# Altium PCB SGK_DVR_01.PcbDoc (part 1 of 7)
Units mil, origin at the board's own origin, x right, y up, seen from the top; angles counter-clockwise.
Board outline 3070.87 x 2598.47 mil, 6 copper layers (Top, L2 GND, l3 POWER, L4 SIG, L5 GND, Bottom), stack 58.1 mil thick; 475 components, 339 nets, 1964 pads, 1036 vias.
Unrouted connection lines stored in the file: 522.
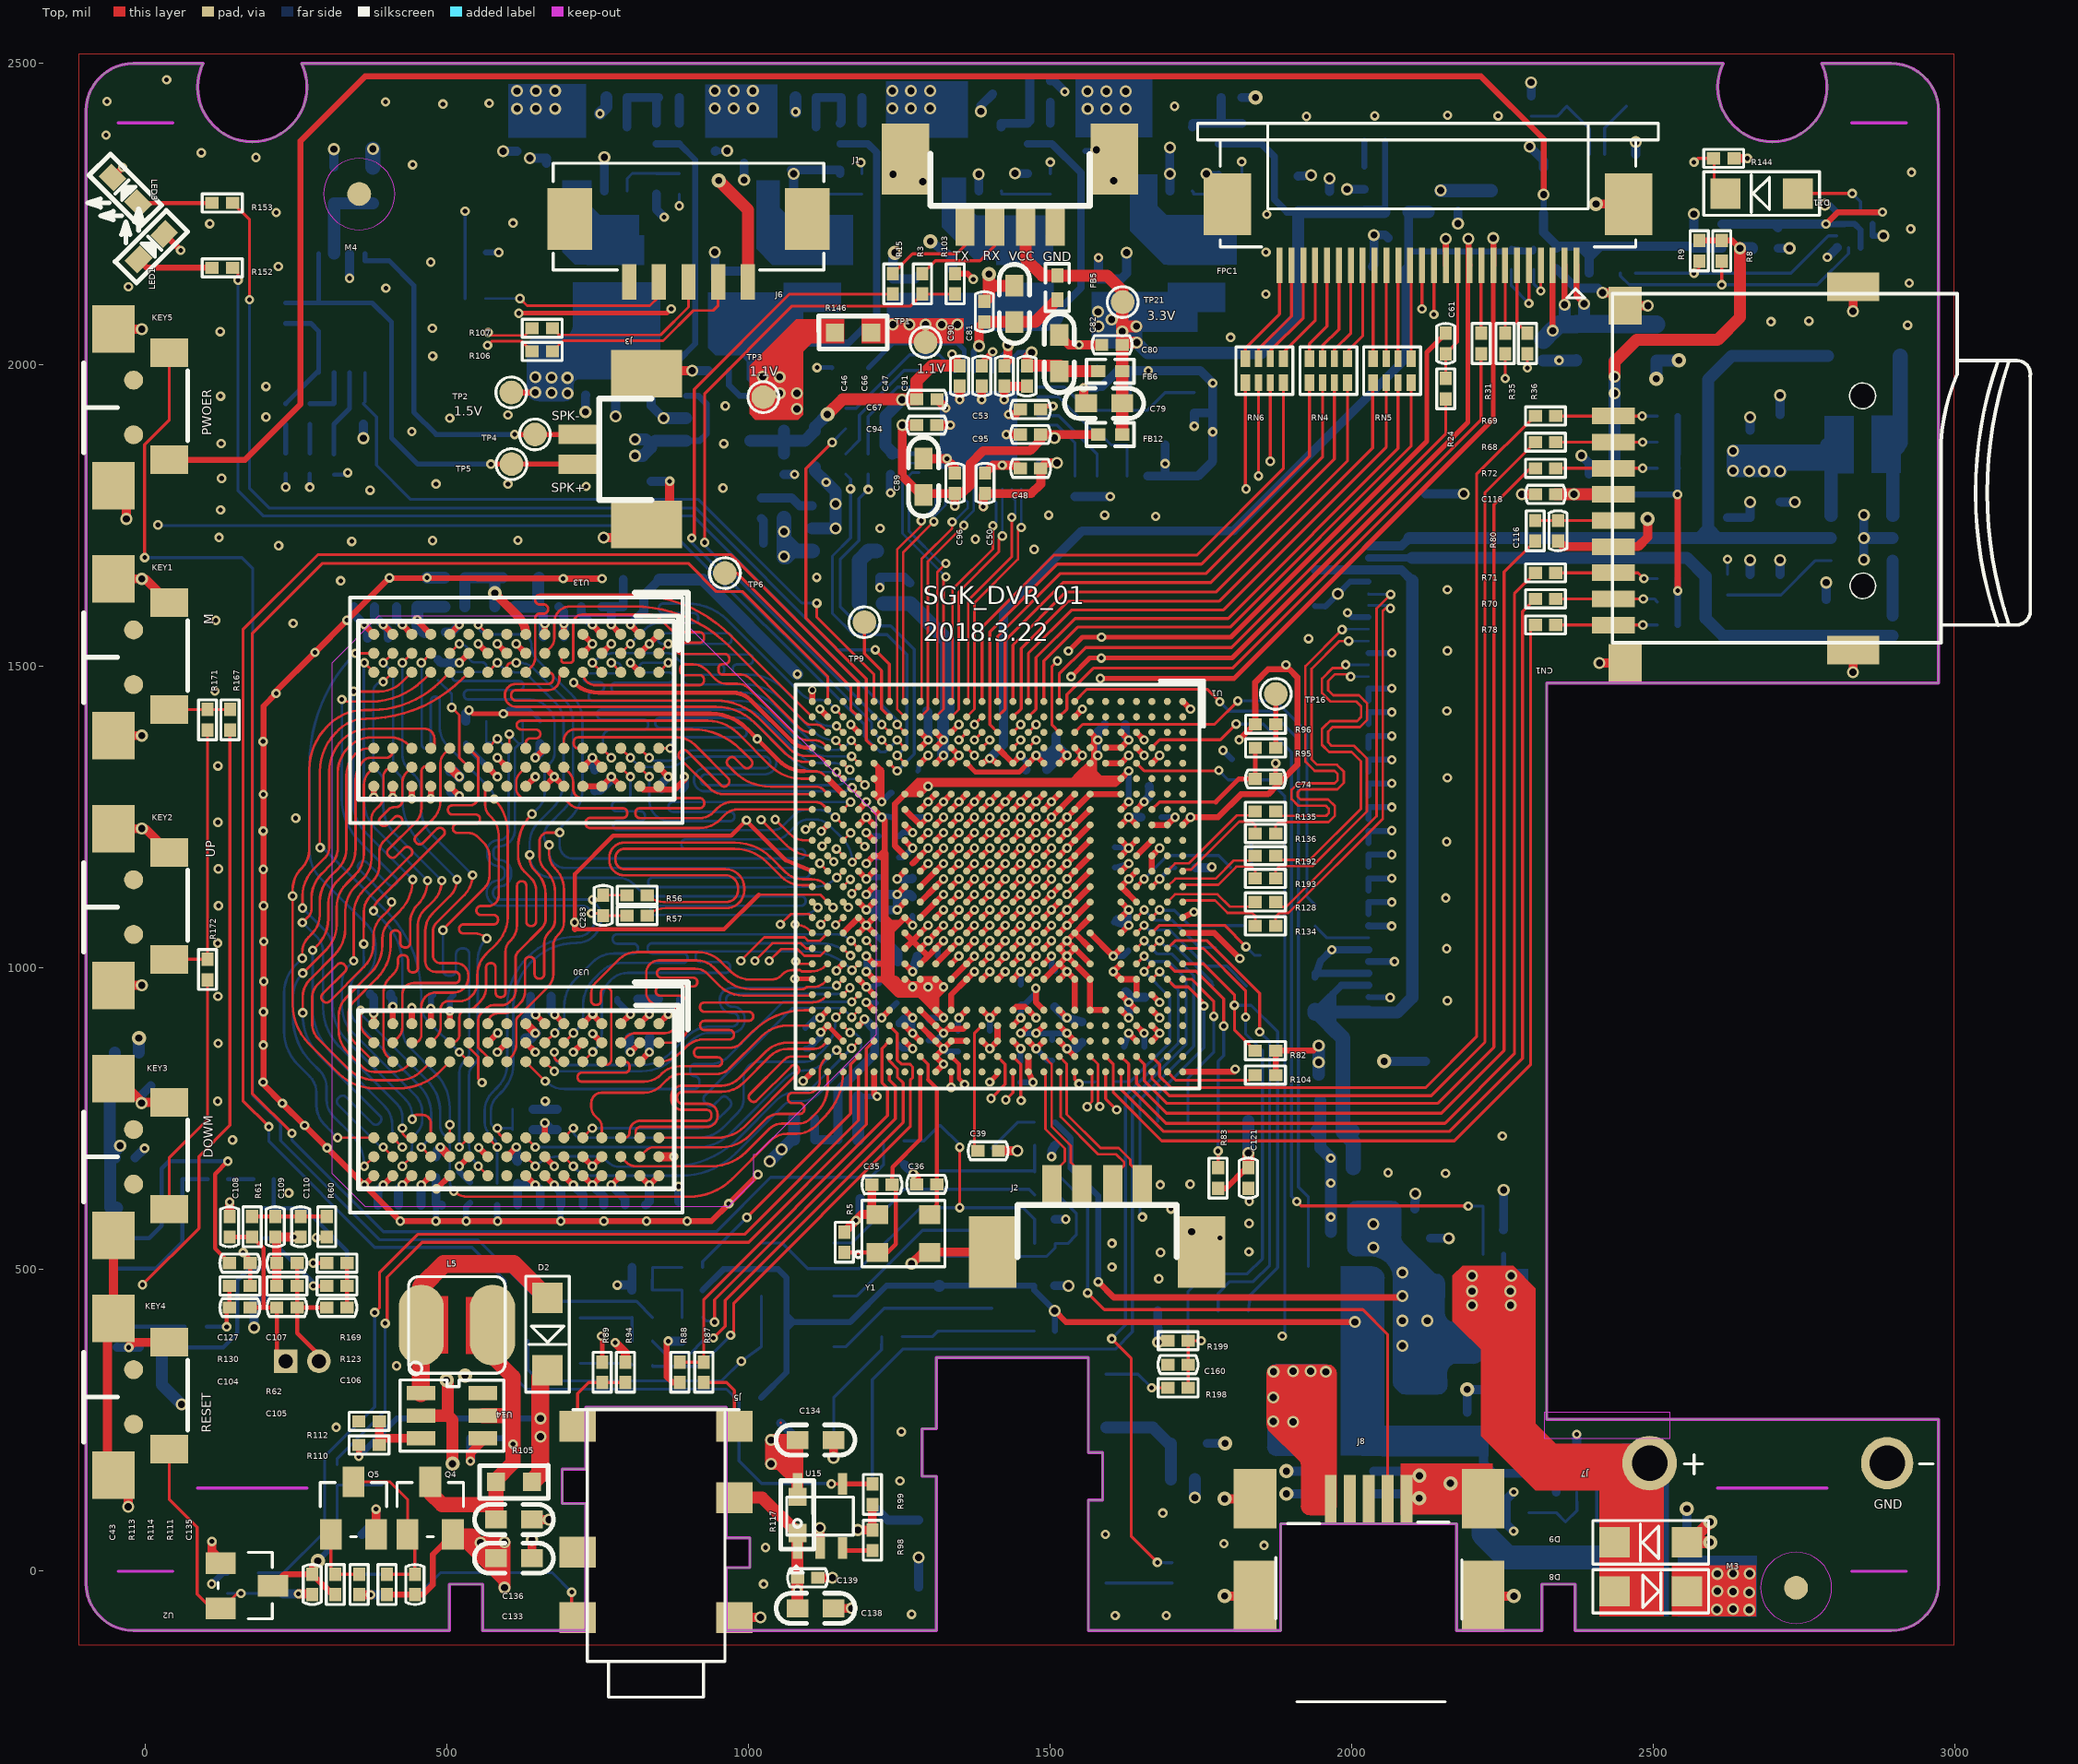
[diagram p0: Top view]
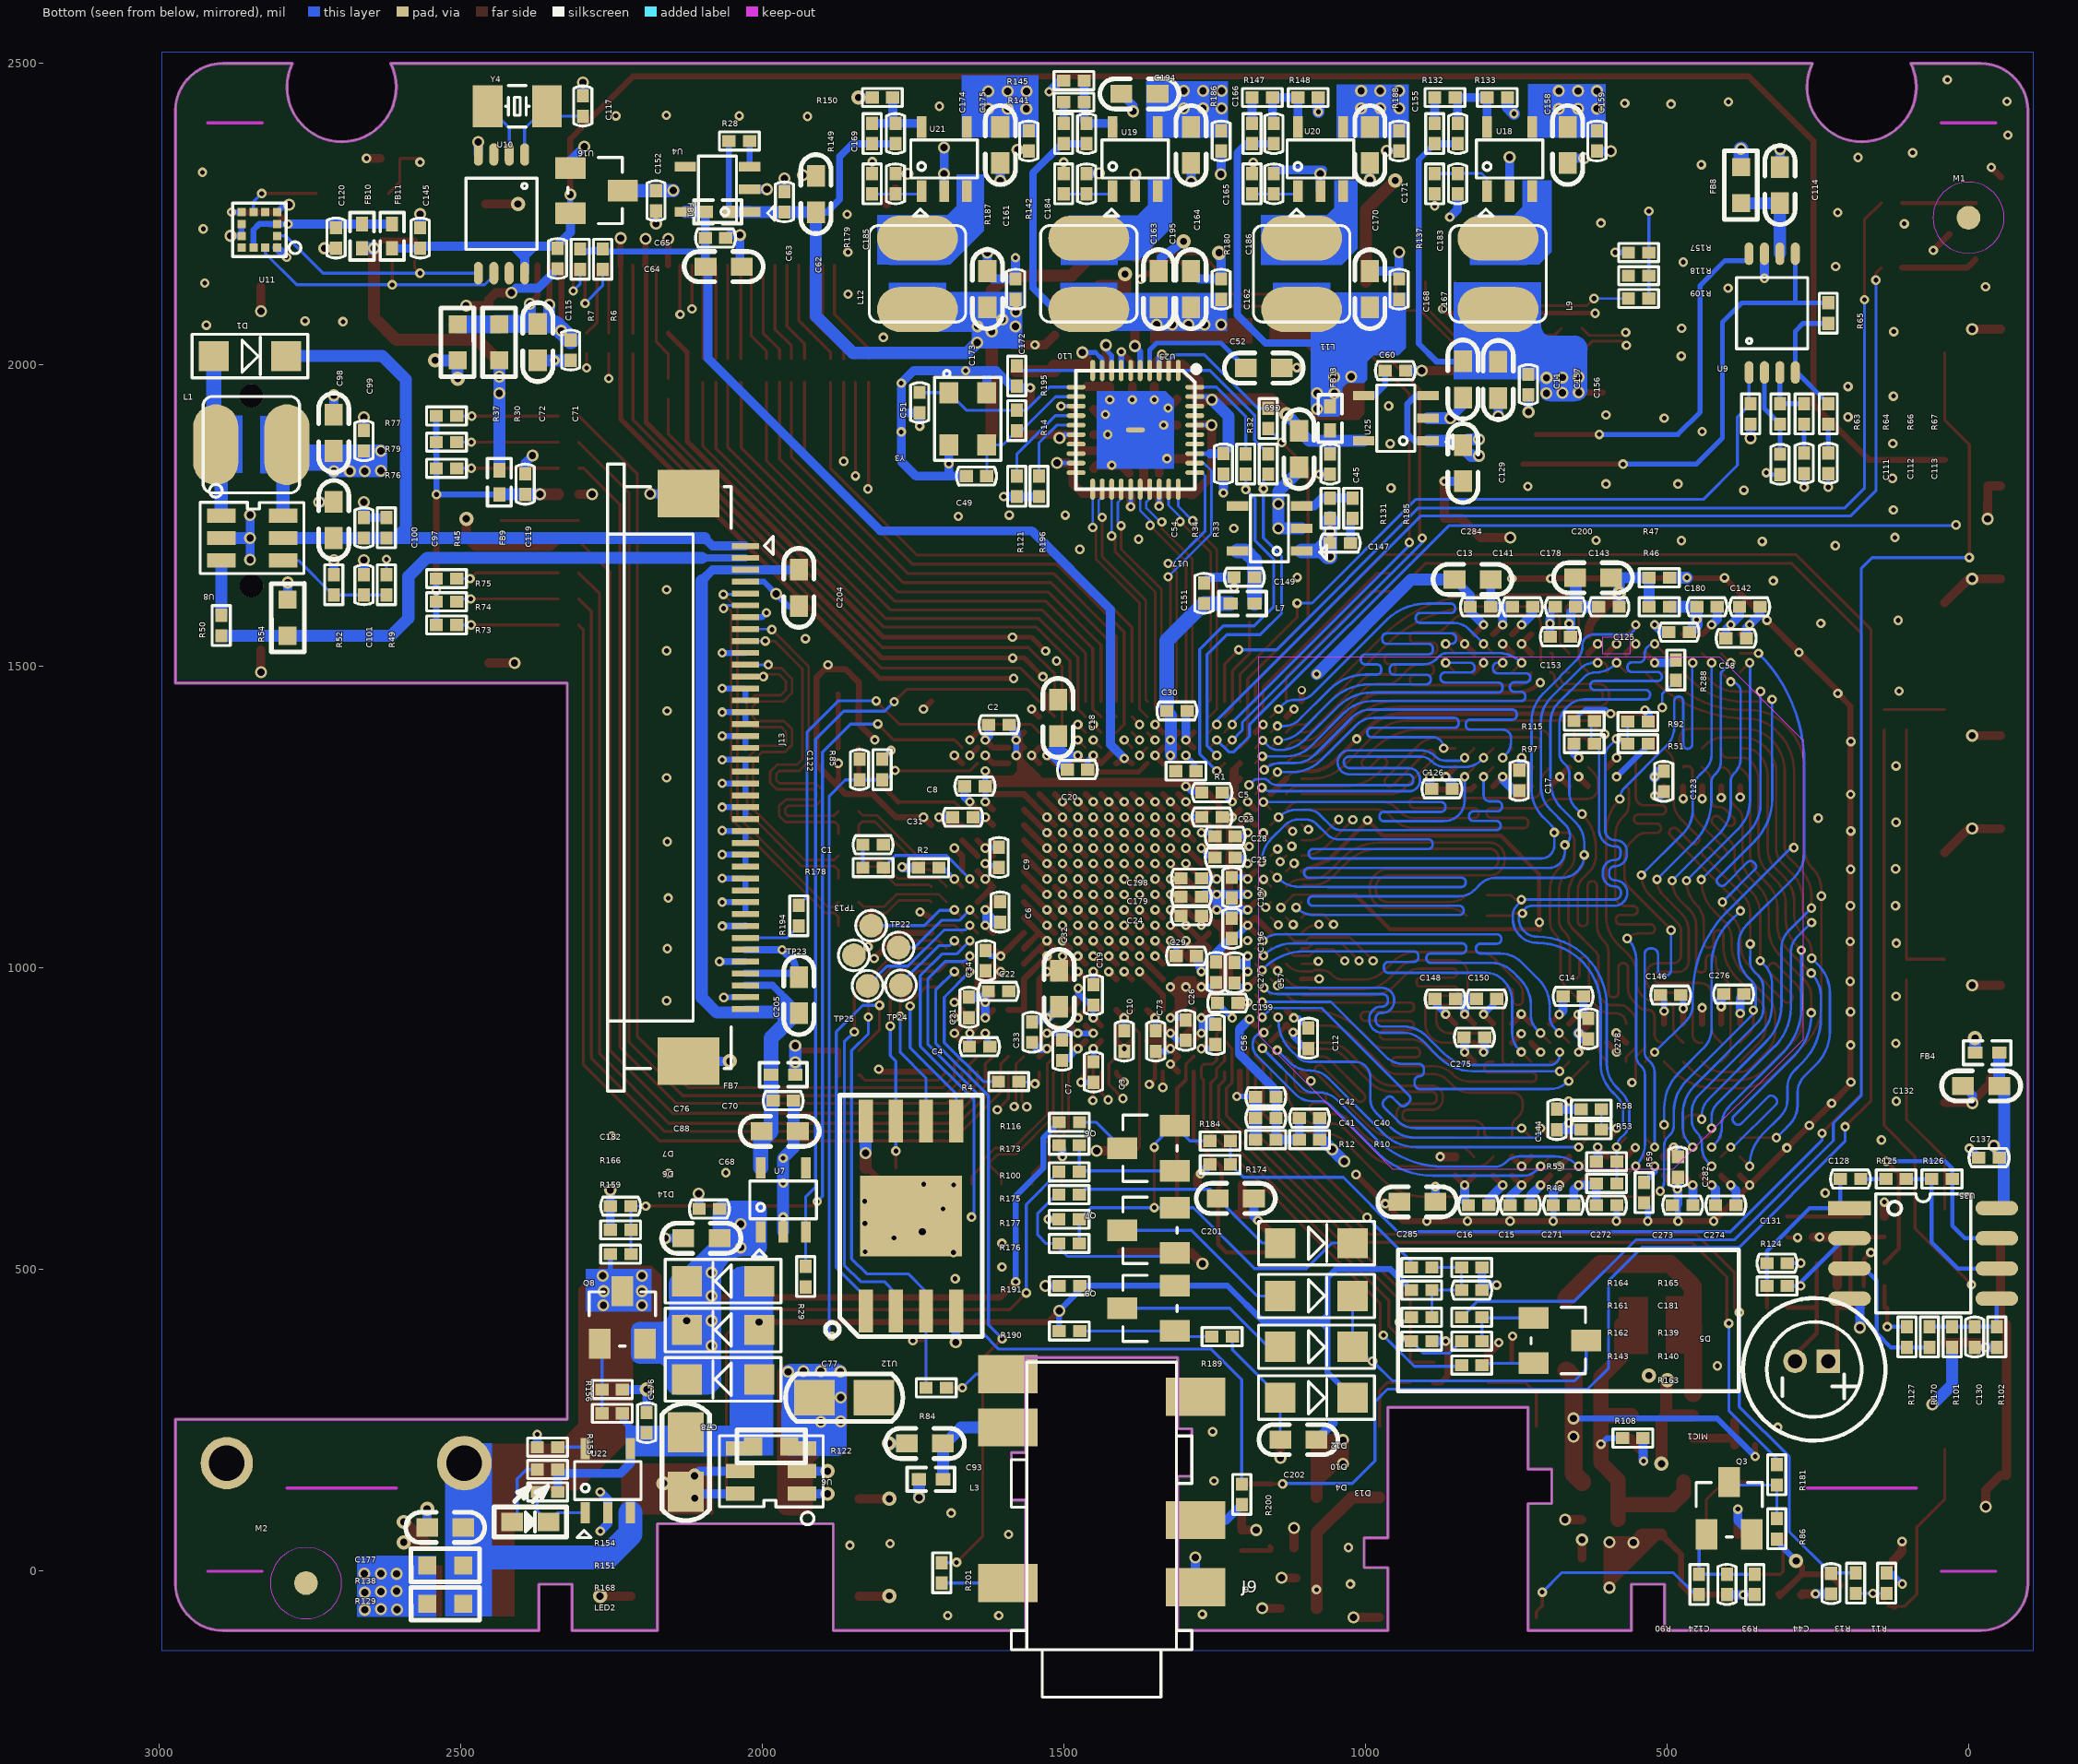
[diagram p1: Bottom view, seen from below]
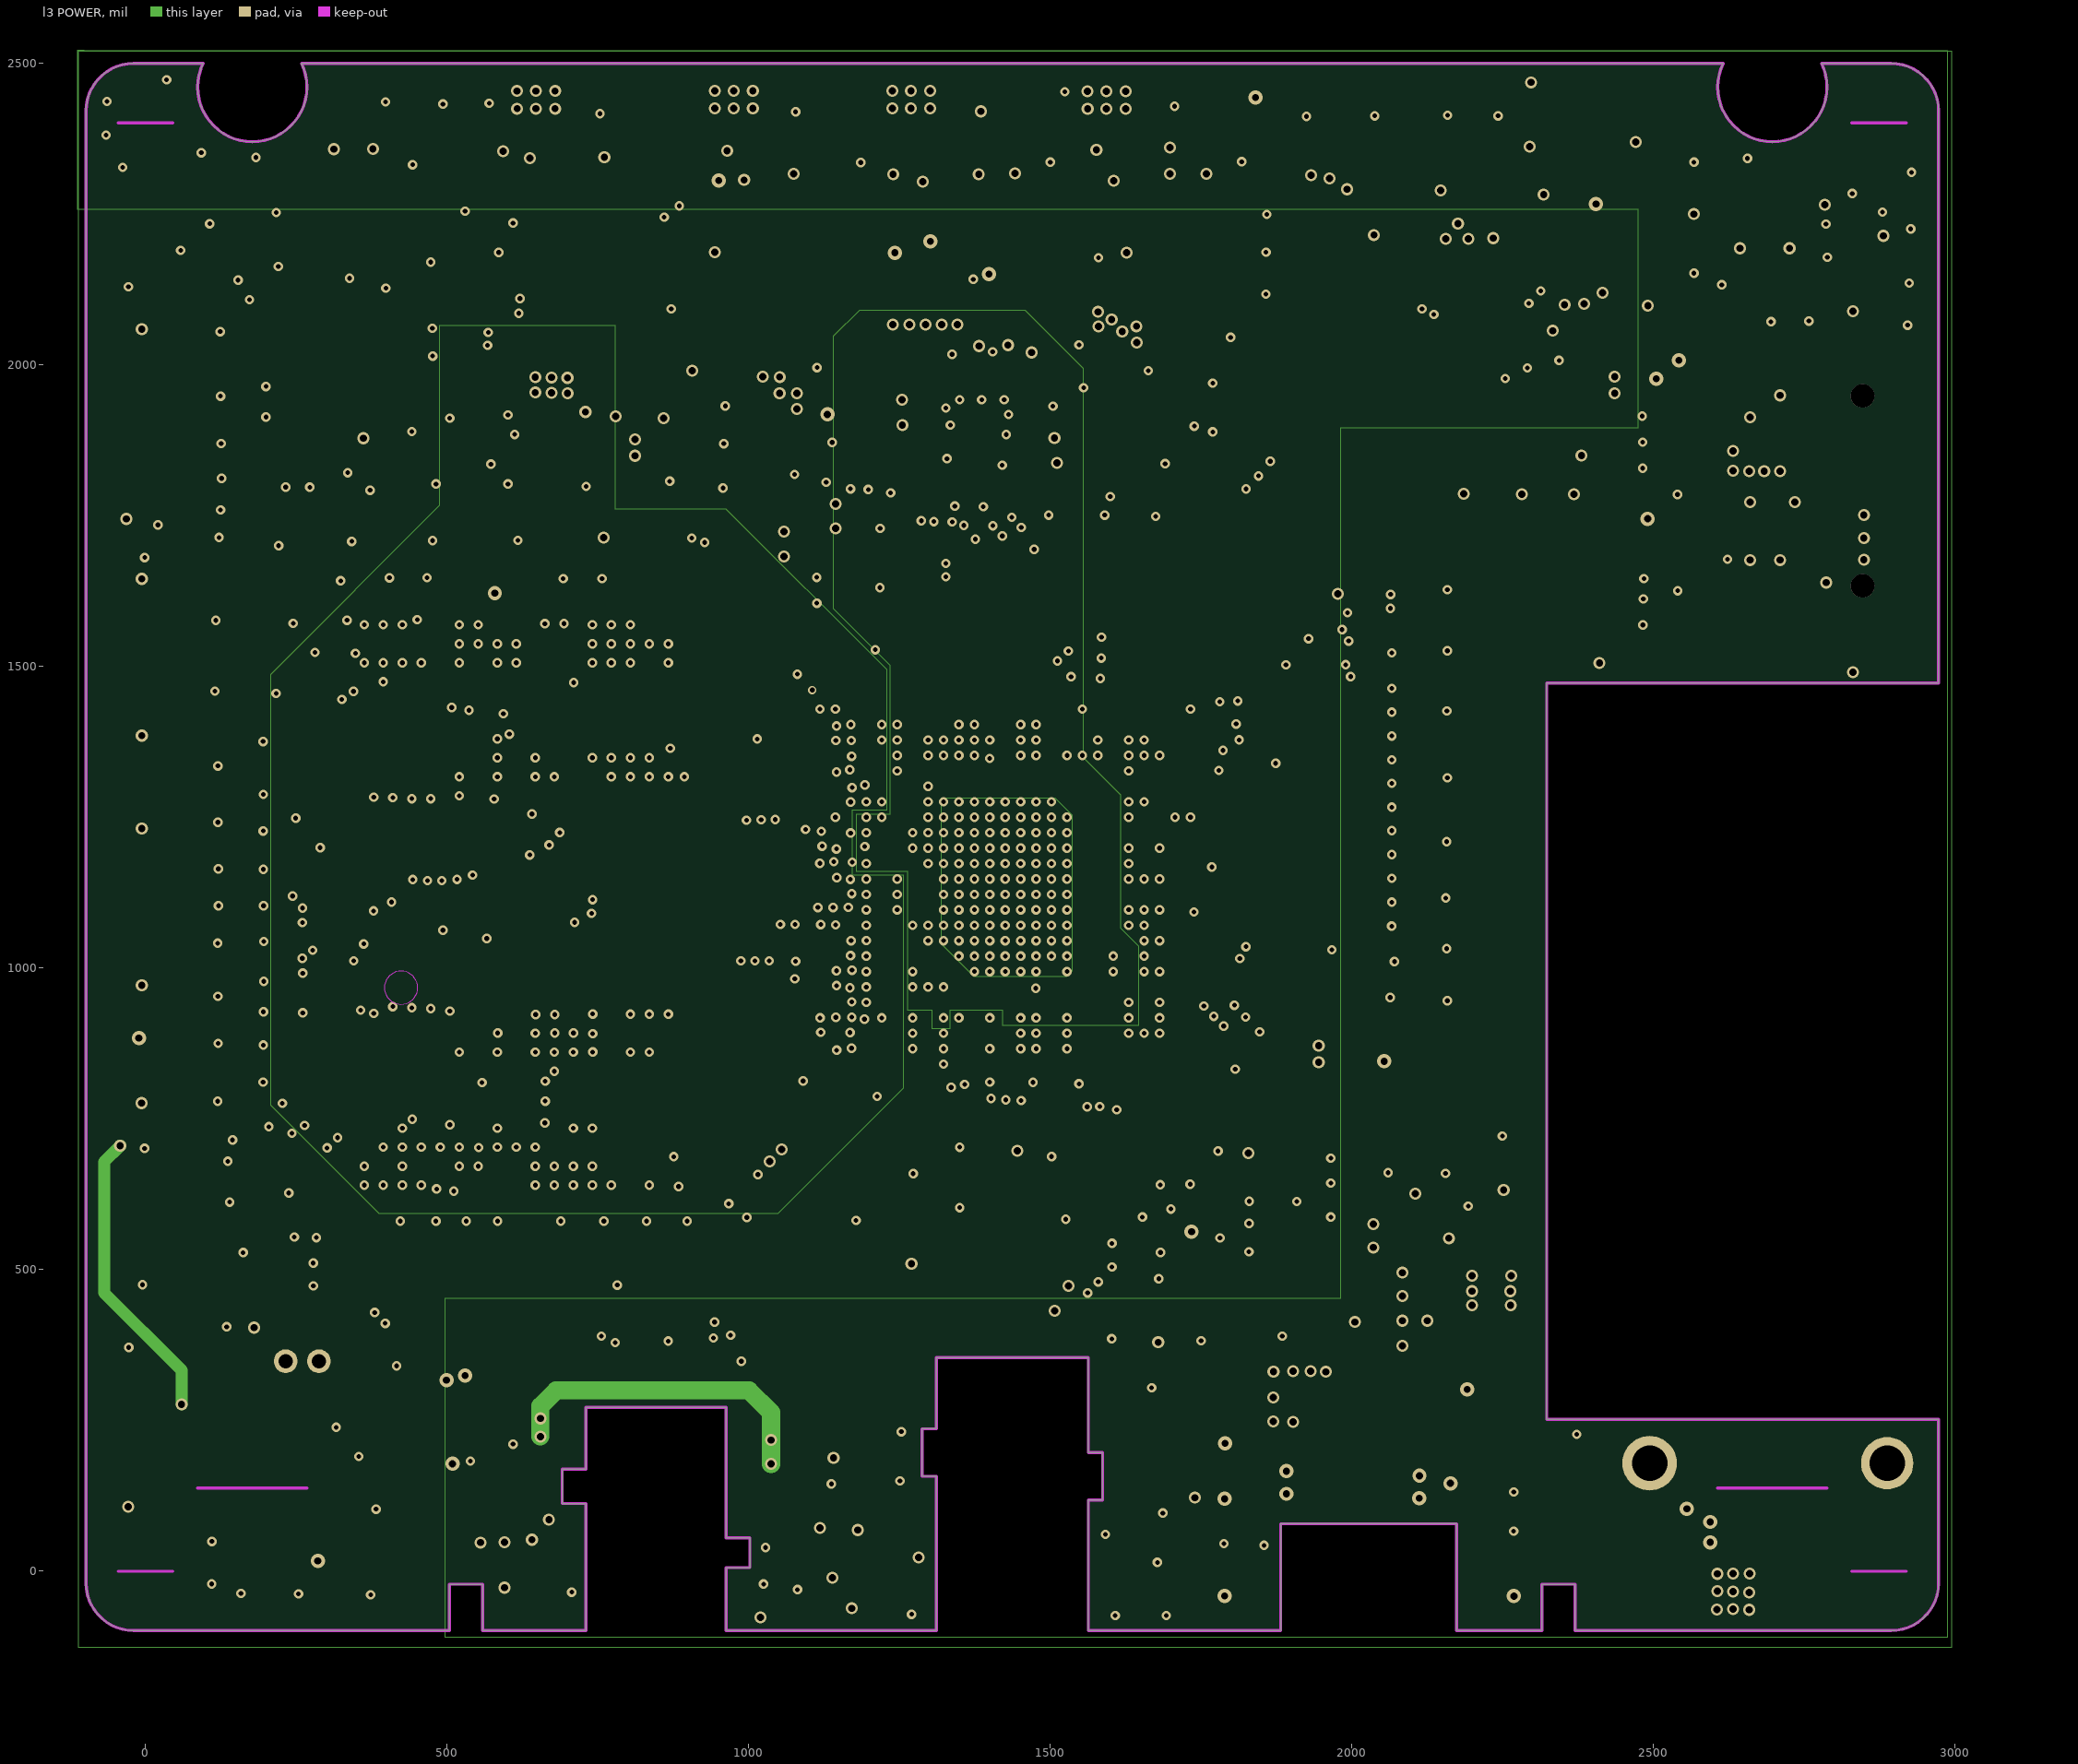
[diagram p2: l3 POWER]
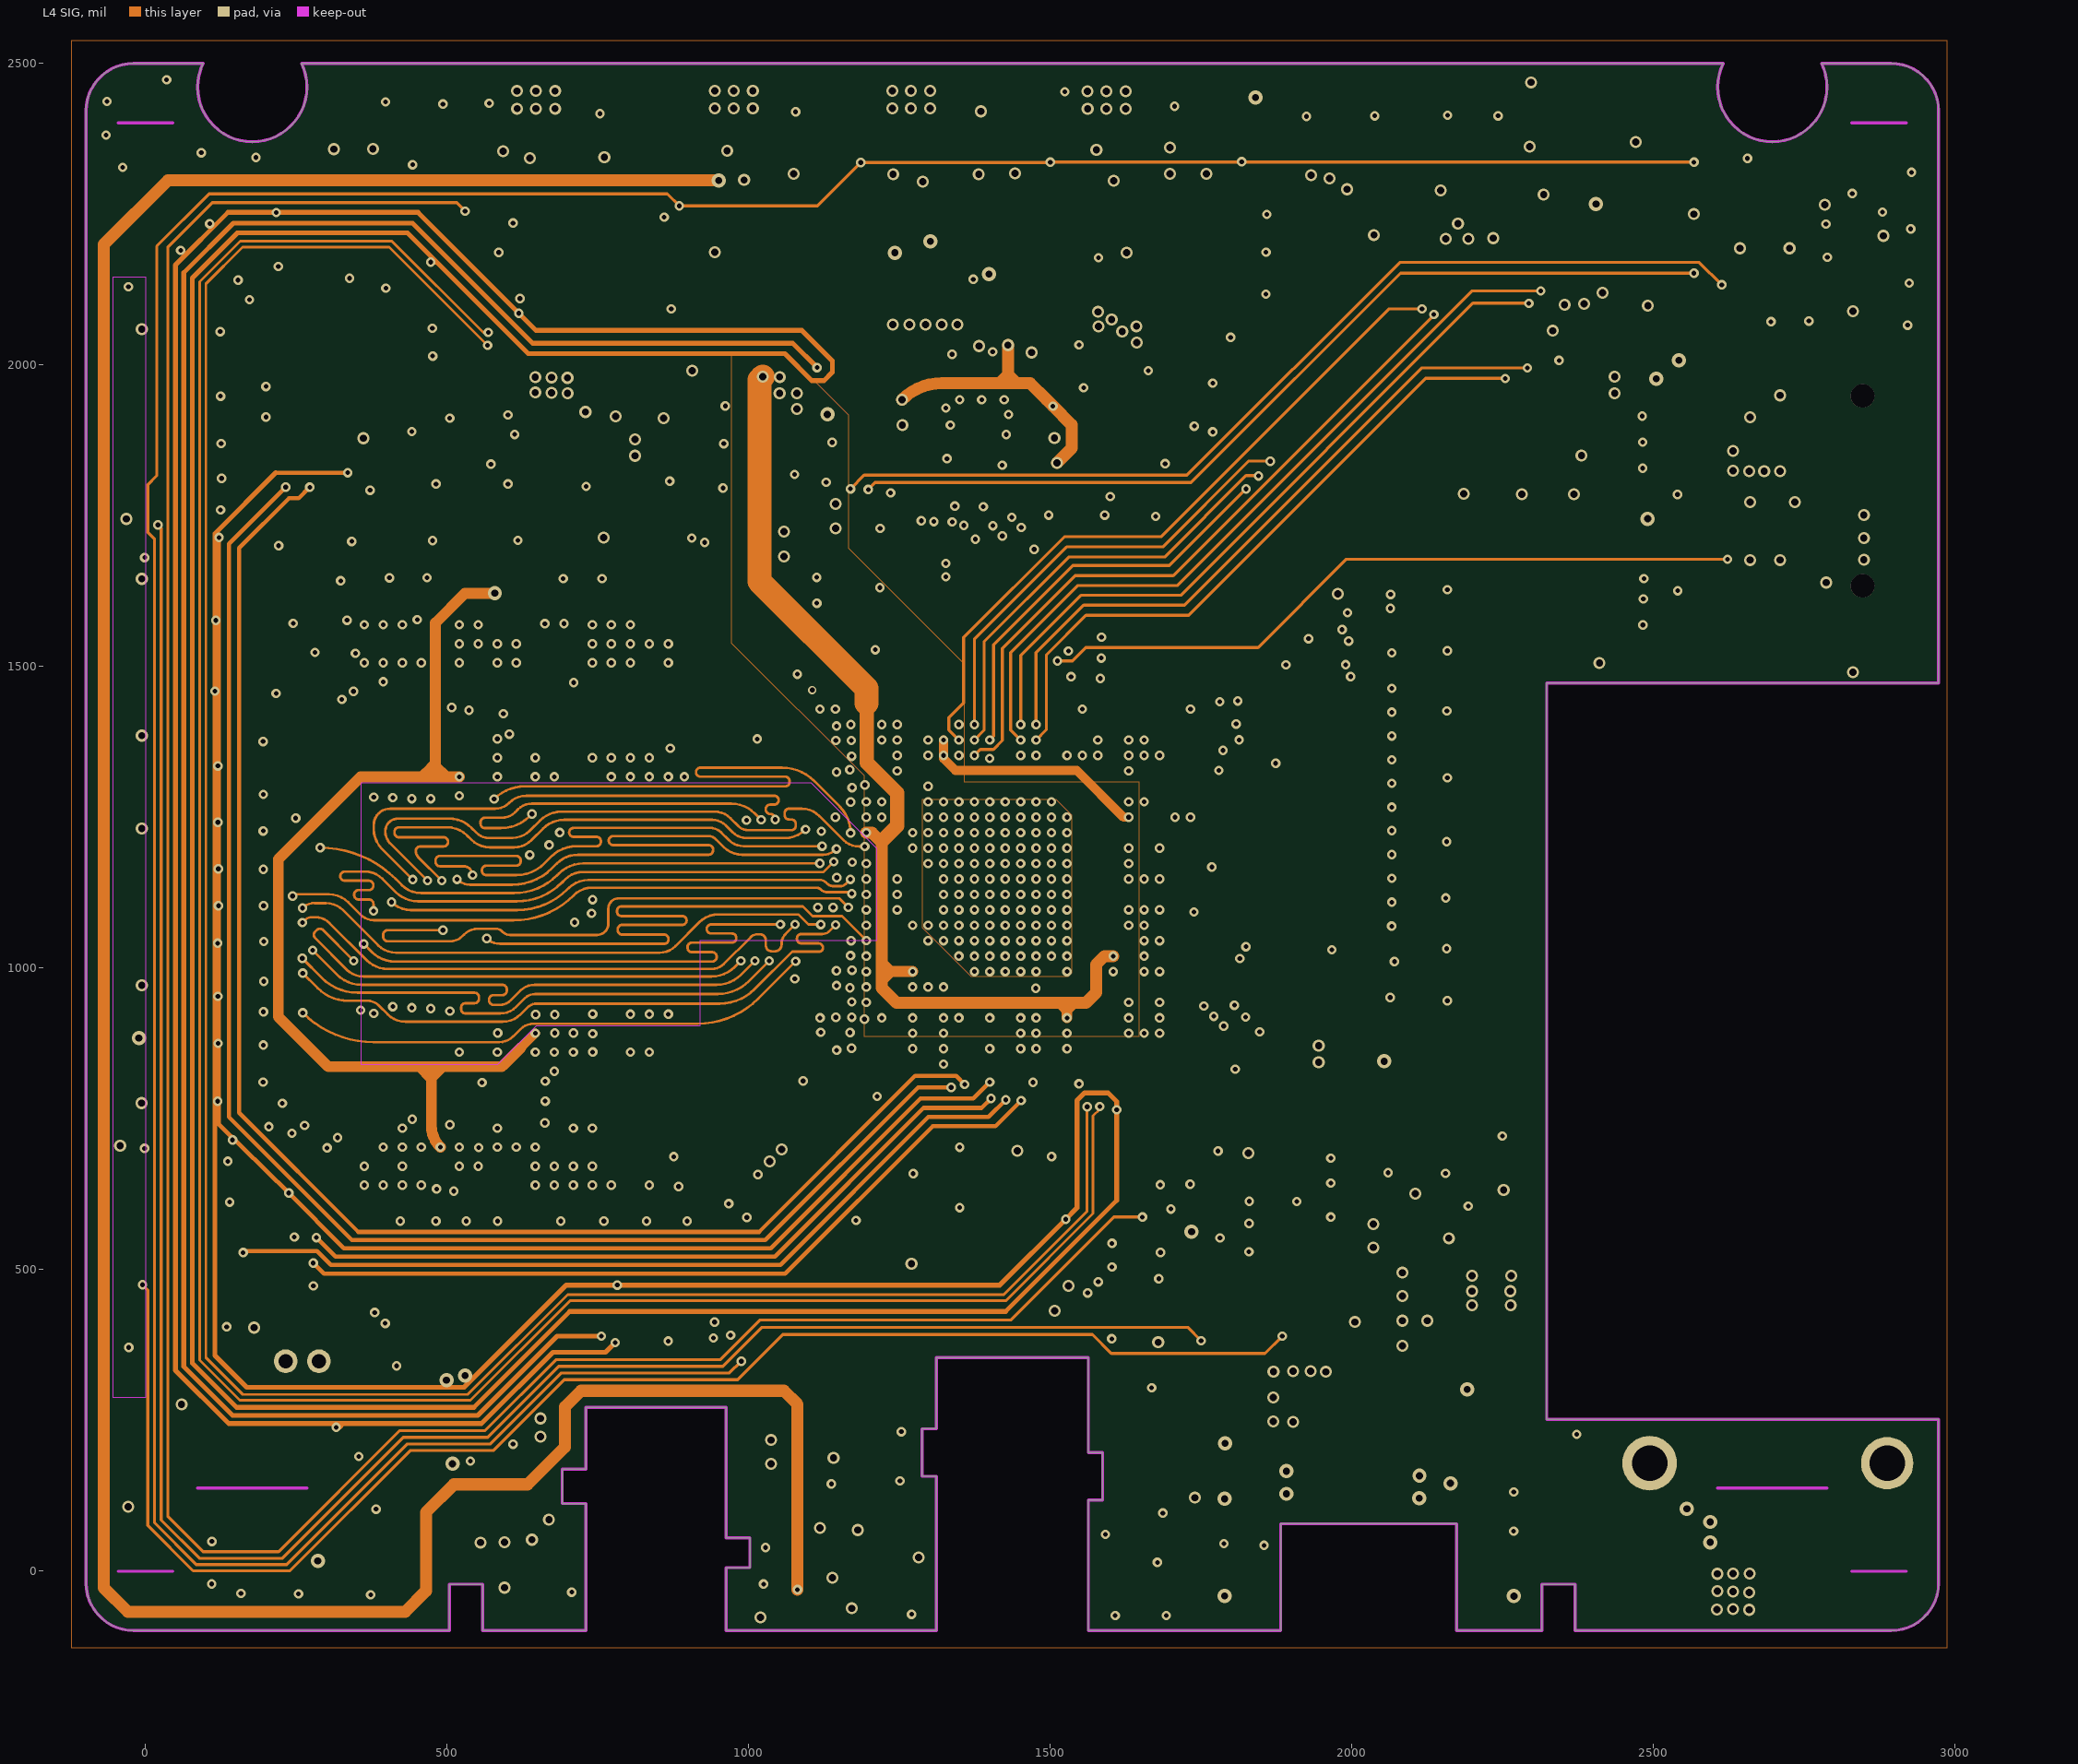
[diagram p3: L4 SIG]

## Layer stack, top to bottom
Solder Mask Top: solder mask 0.4, Solder Resist, Dk 3.5
Top: signal copper 1.35
Dielectric 1: dielectric 10, FR-4, Dk 4.3
L2 GND: signal copper 1.35
Dielectric2: dielectric 10, FR-4, Dk 4.3
l3 POWER: signal copper 1.35
Dielectric3: dielectric 10, FR-4, Dk 4.3
L4 SIG: signal copper 1.35
Dielectric4: dielectric 10, FR-4, Dk 4.3
L5 GND: signal copper 1.35
Dielectric5: dielectric 10, FR-4, Dk 4.3
Bottom: signal copper 1.35
Solder Mask Bottom: solder mask 0.4, Solder Resist, Dk 3.5

## Board outline
-98.43,2421.26 cw(c-19.69,2421.26) -19.69,2500 95.62,2500 95.64,2500.04 ccw(c177.17,2460.63) 258.71,2500 2615.31,2500 2615.33,2500.04 ccw(c2696.85,2460.63) 2778.39,2500 2893.7,2500 cw(c2893.7,2421.26) 2972.44,2421.26 2972.44,1472.44 2322.83,1472.44 2322.83,251.97 2972.44,251.97 2972.44,-19.69 cw(c2893.7,-19.69) 2893.7,-98.43 2370.08,-98.43 2370.08,-21.65 2314.96,-21.65 2314.96,-98.43 2173.23,-98.43 2173.23,78.74 1881.89,78.74 1881.89,-98.43 1562.99,-98.43 1562.99,118.11 1586.61,118.11 1586.61,196.85 1562.99,196.85 1562.99,354.33 1311.02,354.33 1311.02,236.22 1287.4,236.22 1287.4,157.48 1311.02,157.48 1311.02,-98.43 962.6,-98.43 962.6,5.91 1001.97,5.91 1001.97,55.12 962.6,55.12 962.6,271.65 730.31,271.65 730.31,169.29 690.94,169.29 690.94,112.2 730.31,112.2 730.31,-98.43 559.06,-98.43 559.06,-21.65 503.94,-21.65 503.94,-98.43 -19.69,-98.43 cw(c-19.69,-19.69) -98.43,-19.69

## Design rules (kind name [scope] priority, off if disabled: settings)
Clearance "Clearance - Net - VDDIO33" [InNet('VDDIO33')] p1: gap=4 ignorepadtopadclearanceinfootprint=FALSE except(0: Arc-Hole Track-Hole SMDPad-Hole THPad-Hole Via-Hole Fill-Hole Poly-Hole Region-Hole Text-Hole; 5: Arc-Fill Arc-Poly Arc-Region Track-Fill Track-Poly Track-Region SMDPad-Fill SMDPad-Poly SMDPad-Region THPad-Fill THPad-Poly THPad-Region Via-Fill Via-Poly Via-Region; 10: Fill-Fill Fill-Poly Fill-Region Poly-Poly Poly-Region Region-Region Text-Text)
Clearance "Clearance - Default - DEFAULT- SMD" [IsVia vs IsSMTPin] p2: gap=0 ignorepadtopadclearanceinfootprint=FALSE
Clearance "Clearance - Default - DEFAULT - Via" [IsVia vs IsVia] p3: gap=0 ignorepadtopadclearanceinfootprint=FALSE
Clearance "Clearance - Default - DEFAULT - Net" [All] p4: gap=10 ignorepadtopadclearanceinfootprint=FALSE except(0: Arc-Hole Track-Hole SMDPad-Hole THPad-Hole Via-Hole Fill-Hole Poly-Hole Region-Hole Text-Hole; 3.15: Arc-SMDPad Track-SMDPad SMDPad-SMDPad SMDPad-THPad SMDPad-Via; 4: Arc-THPad Arc-Via Arc-Text Track-THPad Track-Via Track-Text SMDPad-Text THPad-THPad THPad-Via THPad-Text Via-Via Via-Text Fill-Text Poly-Text Region-Text; 5: Arc-Arc Arc-Track Track-Track Via-Fill Via-Poly Via-Region)
ComponentClearance "ComponentClearance - Default - DEFAULT" [All] p1: gap=0 collisioncheckmode=3 verticalgap=10 showdistances=FALSE
FanoutControl Fanout_Small [(CompPinCount < 5)] p1: bgadir=Out bgaviamode=Centered fanoutstyle=Auto fanoutdirection=OutThenIn viagrid=1 // Fanout_Small (Default Rule)
FanoutControl Fanout_BGA [IsBGA] p2: bgadir=Out bgaviamode=Centered fanoutstyle=Auto fanoutdirection=Alternating viagrid=1 // Fanout_BGA (Default Rule)
FanoutControl Fanout_LCC [IsLCC] p3: bgadir=Out bgaviamode=Centered fanoutstyle=Auto fanoutdirection=Alternating viagrid=1 // Fanout_LCC (Default Rule)
FanoutControl Fanout_SOIC [IsSOIC] p4: bgadir=Out bgaviamode=Centered fanoutstyle=Auto fanoutdirection=Alternating viagrid=1 // Fanout_SOIC (Default Rule)
HoleToHoleClearance "HoleToHoleClearance - Default - DEFAULT" [All] p1: gap=0 allowstackedmicrovias=TRUE
Length "Default Length" [All] p1: maxlimit=50000 minlimit=0
MatchedLengths MatchedLengths_DDR_CLOCKS_STROBES_1 [InxSignalClass('ADDR_PP1_1') OR InxSignalClass('ADDR_PP2_1') OR InxSignalClass('DATA_BL0_1') OR InxSignalClass('DATA_BL1_1') OR InxSignalClass('DATA_BL2_1') OR InxSignalClass('DATA_BL3_1')] p1: tolerance=5 checknetsindiffpair=TRUE checkdiffpairvsdiffpair=FALSE checkxsignals=FALSE checkothers=FALSE
MatchedLengths MatchedLengths_DATA_BL3_1 [InxSignalClass('DATA_BL3_1')] p2: tolerance=50 checknetsindiffpair=FALSE checkdiffpairvsdiffpair=TRUE checkxsignals=TRUE checkothers=TRUE
MatchedLengths MatchedLengths_DATA_BL2_1 [InxSignalClass('DATA_BL2_1')] p3: tolerance=50 checknetsindiffpair=FALSE checkdiffpairvsdiffpair=TRUE checkxsignals=TRUE checkothers=TRUE
MatchedLengths MatchedLengths_DATA_BL1_1 [InxSignalClass('DATA_BL1_1')] p4: tolerance=50 checknetsindiffpair=FALSE checkdiffpairvsdiffpair=TRUE checkxsignals=TRUE checkothers=TRUE
MatchedLengths MatchedLengths_DATA_BL0_1 [InxSignalClass('DATA_BL0_1')] p5: tolerance=50 checknetsindiffpair=FALSE checkdiffpairvsdiffpair=TRUE checkxsignals=TRUE checkothers=TRUE
MatchedLengths MatchedLengths_ADDR_PP2_1 [InxSignalClass('ADDR_PP2_1')] p6: tolerance=200 checknetsindiffpair=FALSE checkdiffpairvsdiffpair=TRUE checkxsignals=TRUE checkothers=TRUE
MatchedLengths MatchedLengths_ADDR_PP1_1 [InxSignalClass('ADDR_PP1_1')] p7: tolerance=200 checknetsindiffpair=FALSE checkdiffpairvsdiffpair=TRUE checkxsignals=TRUE checkothers=TRUE
MaxMinImpedance "Default Impedance" [All] p1: minimum=50.00 maximum=150.0
ParallelSegment "Default Parallel Segment Adjasent" [All] p1: limit=1000 gap=200
ParallelSegment "Default Parallel Segment Same Layer" [All] p2: limit=1000 gap=200
PlaneConnect "Default PlaneConnect" [All] p1: planeconnectstyle=Relief reliefexpansion=20 reliefentries=4 reliefconductorwidth=15 reliefairgap=10
PolygonConnect "PolygonConnect - Default SMT" [IsSMTPin] p1: connectstyle=Direct reliefconductorwidth=10 reliefentries=4 polygonreliefangle="45 Angle" airgapwidth=10
PolygonConnect "PolygonConnect - Default Pad" [All] p2: connectstyle=Relief reliefconductorwidth=15 reliefentries=4 polygonreliefangle="45 Angle" airgapwidth=10
RoomDefinition "Room: DRW7399202" [All vs False] p1: confinementstyle=ConfineOut formatcopy=TRUE lockcomponents=FALSE outline 78.74,0 ccw(c0,0) 0,78.74 ccw(c0,0) -78.74,0 ccw(c0,0) 0,-78.74 ccw(c0,0)
RoomDefinition "Room: DRW38354153" [All vs False] p2: confinementstyle=ConfineOut formatcopy=TRUE lockcomponents=FALSE outline 2952.76,0 ccw(c2874.02,0) 2874.02,78.74 ccw(c2874.02,0) 2795.28,0 ccw(c2874.02,0) 2874.02,-78.74 ccw(c2874.02,0)
RoomDefinition "Room: DRW19154048" [All vs False] p3: confinementstyle=ConfineOut formatcopy=TRUE lockcomponents=FALSE outline 78.74,2401.57 ccw(c0,2401.57) 0,2480.31 ccw(c0,2401.57) -78.74,2401.57 ccw(c0,2401.57) 0,2322.83 ccw(c0,2401.57)
RoomDefinition "Room: DRW15534276" [All vs False] p4: confinementstyle=ConfineOut formatcopy=TRUE lockcomponents=FALSE outline 2952.76,2401.57 ccw(c2874.02,2401.57) 2874.02,2480.31 ccw(c2874.02,2401.57) 2795.28,2401.57 ccw(c2874.02,2401.57) 2874.02,2322.83 ccw(c2874.02,2401.57)
RoutingLayers "RoutingLayers - Default - DEFAULT" [All] p1: top layer_v5=TRUE mid layer 1_v5=TRUE mid layer 2_v5=TRUE mid layer 3_v5=TRUE mid layer 4_v5=TRUE bottom layer_v5=TRUE
RoutingPriority "RoutingPriority - Default - DEFAULT" [All] p1: routingpriority=3
RoutingTopology RoutingTopology_DDRAddressAndControls [InNetClass('DDR_AddressAndControls')] p1: topology=Daisy_Simple
RoutingTopology "Default Routing Topology" [All] p2: topology=Shortest
RoutingVias "RoutingVias - Default - DEFAULT" [All] p1: holewidth=7.87 width=15.75 viastyle="Through Hole" minholewidth=7.87 minwidth=15.75 maxholewidth=7.87 maxwidth=15.75
SMDToCorner "SMDToCorner - Default - DEFAULT" [All] p1: distance=0
SolderMaskExpansion [All] p1: expansion=4
Width "Width - Net - VDDIO33" [InNet('VDDIO33')] p1: maxlimit=12 minlimit=4.2 preferedwidth=10
Width "Default Width" [All] p2: maxlimit=50 minlimit=3 preferedwidth=5
20 further rules are at their usual default settings.

## Classes and differential pairs
net class DDR_AddressAndControls: A0 A1 A2 A3 A4 A5 A6 A7 A8 A9 A10 A11 A12 A13 A14 A15 BA0 BA1 BA2 CAS# ODT RAS# WE#
net class ddr3_adr: A0 A1 A2 A3 A4 A5 A6 A7 A8 A9 A10 A11 A12 A13 A14 A15
net class ddr3_data: DM0 DM1 DM2 DM3 DQ0 DQ1 DQ2 DQ3 DQ4 DQ5 DQ6 DQ7 DQ8 DQ9 DQ10 DQ11 DQ12 DQ13 DQ14 DQ15 DQ16 DQ17 DQ18 DQ19 DQ20 DQ21 DQ22 DQ23 DQ24 DQ25 DQ26 DQ27 DQ28 DQ29 DQ30 DQ31
net class MLNetGroup9: BA1 DQ3 DQ12
net class MLNetGroup8: A10 DM0 DQS1#
net class MLNetGroup7: CAS# DQ1 DQS1
net class MLNetGroup6: DQ4 DQ8
net class MLNetGroup5: BA0 DQ9 DQS0#
net class MLNetGroup4: A15 DQ15 DQS0
net class MLNetGroup3: A2 DQ0 DQ13
net class MLNetGroup2: A5 DQ2 DQ11
net class MLNetGroup11: A1 DQ7 DQ10
net class MLNetGroup10: A12 DQ5 DQ14
net class MLNetGroup1: A9 CKE DM1 DQ6

## Components (designator, comment, footprint, x,y, rotation, side; value= is the part's Value field where it differs from the comment)
C1 "C0402" C0402 1815.77,1204.43 r0 bottom
C2 "C0402" C0402 1607.25,1403.56 r180 bottom
C3 "C0402" C0402 1450.45,827.68 r90 bottom
C4 "C0402" C0402 1639.19,869.6 r0 bottom
C5 "C0402" C0402 1253.98,1290.95 r0 bottom
C6 "C0402" C0402 1605.41,1093.05 r270 bottom
C7 "C0402" C0402 1502.81,863.87 r90 bottom
C8 "C0402" C0402 1647.12,1301.42 r180 bottom
C9 "C0402" C0402 1607.08,1183.56 r270 bottom
C10 "C0402" C0402 1399.63,879.04 r90 bottom
C11 "C0603" C0603 838.18,1975.89 r90 bottom
C12 "C0402" C0402 1094.14,883.68 r90 bottom
C13 "C0402" C0402 809.05,1598.93 r180 bottom
C14 "C0402" C0402 655.33,952.96 r0 bottom
C15 "C0402" C0402 742.7,607.15 r0 bottom
C16 "C0402" C0402 812.2,607.15 r180 bottom
C17 "C0402" C0402 744.72,1311.07 r270 bottom
C18 "C0603" C0603 1509.31,1414.92 r270 bottom
C19 "C0402" C0402 1450.75,955.61 r270 bottom
C20 "C0402" C0402 1477.11,1328.93 r0 bottom
C21 "C0402" C0402 1657.08,934.78 r90 bottom
C22 "C0402" C0402 1607.99,961.32 r0 bottom
C23 "C0402" C0402 1253.98,1250.38 r180 bottom
C24 "C0402" C0402 1288.42,1086.56 r180 bottom
C25 "C0402" C0402 1232.33,1183.53 r180 bottom
C26 "C0402" C0402 1297.82,896.91 r90 bottom
C27 "C0402" C0402 1247.22,993.17 r270 bottom
C28 "C0402" C0402 1232.33,1218.53 r180 bottom
C29 "C0402" C0402 1296.51,1020.05 r180 bottom
C30 "C0402" C0402 1312.16,1426.33 r0 bottom
C31 "C0402" C0402 1667.15,1250.11 r180 bottom
C32 "C0603" C0603 1507.4,965.8 r270 bottom
C33 "C0402" C0402 1552.55,893.73 r90 bottom
C34 "C0402" C0402 1629.41,1012.34 r90 bottom
C35 "C0402" C0402 1220.98,640.84 r180 top
C36 "C0402" C0402 1295.13,641.49 r180 top
C39 "C0402" C0402 1396.89,697.09 r0 top
C40 "C0402" C0402 1092.41,751.1 r0 bottom
C41 "C0402" C0402 1164.85,751.1 r0 bottom
C42 "C0402" C0402 1164.85,786.61 r0 bottom
C43 "C0402" C0402 276.5,-22 r90 top
C44 "C0402" C0402 227.89,-20.61 r90 bottom
C45 "C0402" C0402 1058.36,1835.66 r90 bottom
C46 "C0402" C0402 1349.59,1981.62 r90 top
C47 "C0402" C0402 1423.73,1981.62 r90 top
C48 "C0402" C0402 1467.08,1828.54 r0 top
C49 "C0402" C0402 1644.39,1815.81 r0 bottom
C50 "C0402" C0402 1391.77,1803.88 r270 top
C51 "C0402" C0402 1738.66,1937.52 r270 bottom
C52 "C0603" C0603 1168.16,1995.06 r0 bottom
C53 "C0402" C0402 1467.08,1926.16 r0 top
C54 "C0402" C0402 1235.22,1836 r90 bottom
C56 "C0402" C0402 1248.46,889.98 r90 bottom
C57 "C0402" C0402 1216.54,992.34 r90 bottom
C58 "C0402" C0402 385.1,1546.74 r0 bottom
C60 "C0402" C0402 950.16,1990.65 r180 bottom
C61 "C0402" C0402 2155.51,2035.7 r270 top
C62 "C0603" C0603 1910.68,2283.21 r270 bottom
C63 "C0402" C0402 1962.75,2270.53 r270 bottom
C64 "C0603" C0603 2063.52,2163.01 r0 bottom
C65 "C0402" C0402 2077.01,2210.56 r0 bottom
C66 "C0402" C0402 1386.16,1981.62 r90 top
C67 "C0402" C0402 1295.28,1942.99 r0 top
C68 "C0603" C0603 1970.66,729.51 r0 bottom
C69 "C0603" C0603 1109.73,1860.57 r270 bottom
C70 "C0402" C0402 1964.83,780.09 r0 bottom
C71 "C0402" C0402 2317.16,2024.58 r90 bottom
C72 "C0603" C0603 2371.76,2037.97 r90 bottom
C73 "C0402" C0402 1347.32,879.04 r90 bottom
C74 "C0402" C0402 1856.56,1313.61 r0 top
C76 "C0402" C0402 2087.26,600.61 r180 bottom
C77 "C0805" C0805 1863.73,287.72 r0 bottom
C78 "C0805" C0805 2126.34,181.02 r90 bottom
C79 "C0603" C0603 1589.21,1936.49 r0 top
C80 "C0402" C0402 1602.21,2033.46 r0 top
C81 "C0603" C0603 1440.48,2101.41 r270 top
C82 "C0603" C0603 1514.85,2019.56 r270 top
C88 "C0603" C0603 2100.43,552.14 r180 bottom
C89 "C0603" C0603 1289.81,1814.71 r270 top
C90 "C0402" C0402 1390.61,2088.41 r270 top
C91 "C0402" C0402 1461.12,1981.62 r90 top
C93 "C0603" C0603 1729.88,211.91 r180 bottom
C94 "C0402" C0402 1295.11,1900.27 r180 top
C95 "C0402" C0402 1467.08,1884.65 r0 top
C96 "C0402" C0402 1341.74,1803.88 r270 top
C97 "C0402" C0402 2659.8,1730.02 r90 bottom
C98 "C0603" C0603 2709.83,1887.5 r270 bottom
C99 "C0402" C0402 2659.8,1874.5 r90 bottom
C100 "C0603" C0603 2709.83,1743.02 r270 bottom
C101 "C0402" C0402 2659.8,1635.47 r90 bottom
C104 "C0402" C0402 156.46,437.15 r0 top
C105 "C0402" C0402 234.65,437.15 r180 top
C106 "C0402" C0402 317.39,437.15 r180 top
C107 "C0402" C0402 234.65,510.89 r0 top
C108 "C0402" C0402 139.46,571.09 r270 top
C109 "C0402" C0402 215.18,571.09 r90 top
C110 "C0402" C0402 257.39,571.09 r90 top
C111 "C0402" C0402 312.5,1835.21 r90 bottom
C112 "C0402" C0402 272.44,1836.96 r90 bottom
C113 "C0402" C0402 232.48,1836.96 r90 bottom
C114 "C0603" C0603 312.59,2298.14 r270 bottom
C115 "C0402" C0402 2338.87,2176.49 r270 bottom
C116 "C0402" C0402 2341.57,1725.13 r90 top
C117 "C0402" C0402 2297.14,2429.32 r90 bottom
C118 "C0402" C0402 2320.87,1785.43 r0 top
C119 "C0402" C0402 2392.71,1802.43 r270 bottom
C120 "C0402" C0402 2706.19,2210.49 r270 bottom
C121 "C0402" C0402 1828.14,651.93 r270 top
C122 "C0402" C0402 1838.48,1329.24 r270 bottom
C123 "C0402" C0402 505.25,1309.65 r90 bottom
C124 "C0402" C0402 400.53,-21.94 r90 bottom
C125 "C0402" C0402 479.88,1556.87 r180 bottom
C126 "C0402" C0402 872.94,1297.18 r180 bottom
C127 "C0402" C0402 156.46,510.89 r0 top
C128 "C0402" C0402 195.67,650.26 r180 bottom
C129 "C0603" C0603 838.18,1837.26 r270 bottom
C130 "C0402" C0402 -10.08,388.3 r90 bottom
C131 "C0402" C0402 317.39,510.8 r180 bottom
C132 "C0603" C0603 -20.93,804.64 r180 bottom
C133 "C0603" C0603 610.74,21.63 r180 top
C134 "C0603" C0603 1110.69,217.46 r180 top
C135 "C0402" C0402 446.68,-21.94 r270 top
C136 "C0603" C0603 610.87,85.64 r180 top
C137 "C0402" C0402 -33.93,685.71 r180 bottom
C138 "C0603" C0603 1110.88,-61.56 r180 top
C139 "C0402" C0402 1097.88,-11.06 r180 top
C141 "C0402" C0402 739.4,1598.93 r0 bottom
C142 "C0402" C0402 362.7,1598.93 r0 bottom
C143 "C0402" C0402 596.12,1598.93 r180 bottom
C144 "C0402" C0402 682.2,749.02 r270 bottom
C145 "C0402" C0402 2566.59,2210.49 r270 bottom
C146 "C0402" C0402 493.87,955.29 r180 bottom
C147 "C0402" C0402 1041.47,1704.63 r0 bottom
C148 "C0402" C0402 867.35,948.97 r0 bottom
C149 "C0402" C0402 1200.43,1648.01 r180 bottom
C150 "C0402" C0402 798.84,948.97 r180 bottom
C151 "C0402" C0402 1267.42,1621.47 r270 bottom
C152 "C0402" C0402 2175.67,2272.22 r90 bottom
C153 "C0402" C0402 676.57,1549.32 r0 bottom
C155 "C0402" C0402 846.97,2383.74 r90 bottom
C156 "C0402" C0402 729.52,1967.36 r270 bottom
C157 "C0603" C0603 779.59,1975.13 r270 bottom
C158 "C0603" C0603 664.63,2364.59 r270 bottom
C159 "C0402" C0402 615.94,2371.57 r270 bottom
C160 "C0402" C0402 1711.65,342.56 r0 top
C161 "C0402" C0402 1461.88,2383.74 r90 bottom
C162 "C0402" C0402 1238.95,2125.6 r90 bottom
C163 "C0603" C0603 1342.52,2125.66 r90 bottom
C164 "C0603" C0603 1288.74,2364.59 r270 bottom
C165 "C0402" C0402 1238.95,2371.57 r270 bottom
C166 "C0402" C0402 1151.42,2383.74 r90 bottom
C167 "C0402" C0402 944.06,2125.6 r90 bottom
C168 "C0603" C0603 992.35,2125.66 r90 bottom
C169 "C0402" C0402 1778.81,2383.74 r90 bottom
C170 "C0603" C0603 992.35,2364.59 r270 bottom
C171 "C0402" C0402 944.06,2371.57 r270 bottom
C172 "C0402" C0402 1579.74,2125.6 r90 bottom
C173 "C0603" C0603 1626.4,2125.66 r90 bottom
C174 "C0603" C0603 1604.98,2364.59 r270 bottom
C175 "C0402" C0402 1557.87,2371.57 r270 bottom
C176 "C0402" C0402 2191.11,246.39 r270 bottom
C177 "C0603" C0603 2525.13,72.56 r180 bottom
C178 "C0402" C0402 668.33,1598.93 r0 bottom
C179 "C0402" C0402 1288.42,1118.42 r180 bottom
C180 "C0402" C0402 433.52,1598.93 r0 bottom
C181 "C0402" C0402 823.4,466.03 r0 bottom
C182 "C0402" C0402 2234.37,605.37 r180 bottom
C183 "C0402" C0402 846.97,2300.46 r90 bottom
C184 "C0402" C0402 1461.88,2300.46 r270 bottom
C185 "C0402" C0402 1778.81,2300.46 r270 bottom
C186 "C0402" C0402 1151.42,2300.46 r270 bottom
C194 "C0603" C0603 1374.34,2449.45 r0 bottom
C195 "C0603" C0603 1288.74,2125.66 r90 bottom
C196 "C0402" C0402 1221.13,1065.8 r90 bottom
C197 "C0402" C0402 1221.13,1133.43 r270 bottom
C198 "C0402" C0402 1288.42,1149.07 r180 bottom
C199 "C0402" C0402 1228.07,942.06 r0 bottom
C200 "C0603" C0603 622.5,1647.19 r180 bottom
C201 "C0603" C0603 1214.59,618.01 r0 bottom
C202 "C0603" C0603 1110.89,218.16 r0 bottom
C204 "C0603" C0603 1938.98,1630.43 r90 bottom
C205 "C0603" C0603 1938.79,955.05 r270 bottom
C271 "C0402" C0402 671.44,607.15 r180 bottom
C272 "C0402" C0402 599.99,607.15 r0 bottom
C273 "C0402" C0402 473.89,607.03 r180 bottom
C274 "C0402" C0402 402.44,607.03 r180 bottom
C275 "C0402" C0402 819.23,885.32 r180 bottom
C276 "C0402" C0402 389.3,956.87 r0 bottom
C278 "C0402" C0402 630.23,899.68 r270 bottom
C282 "C0402" C0402 481.74,670.22 r90 bottom
C283 "C0402" C0402 758.79,1103.89 r90 top
C284 "C0603" C0603 822.05,1644.31 r180 bottom
C285 "C0603" C0603 913.73,612.47 r180 bottom
CN1 "TF-CARD" TF-CARD 2846.46,1948.82 r90 top
D1 "SOD-123" SOD-123 2848.82,2014.77 r90 bottom
D2 "SOD-123" SOD-123 666.43,393.08 r0 top
D4 "SOD-123" SOD-123 1080.89,372.12 r90 bottom
D5 "SOT-23" SOT-23 675,382.34 r270 bottom
D6 "SOD-123" SOD-123 2064.36,399.86 r270 bottom
D7 "SOD-123" SOD-123 2064.36,480.86 r270 bottom
D8 "SOD-123" SOD-123 2495.18,-33.42 r90 top
D9 "SOD-123" SOD-123 2495.18,47.94 r270 top
D10 "SOD-123" SOD-123 1080.88,456.37 r90 bottom
D11 "SOD-123" SOD-123 2679.06,2284.21 r270 top
D12 "SOD-123" SOD-123 1080.88,544.01 r90 bottom
D13 "SOD-123" SOD-123 1080.89,287.91 r90 bottom
D14 "SOD-123" SOD-123 2064.36,318.05 r270 bottom
FB1 "L0402" L0402 2073.53,2253.91 r0 bottom
FB4 "L0402" L0402 -30.93,859.73 r180 bottom
FB5 "L0402" L0402 1511.55,2128.24 r270 top
FB6 "L0402" L0402 1599.21,1989.56 r180 top
FB7 "L0402" L0402 1964.89,823.25 r0 bottom
FB8 "L0603" L0603 377.22,2268.17 r90 bottom
FB9 "L0402" L0402 2435.52,1805.43 r270 bottom
FB10 "L0402" L0402 2662.98,2213.49 r90 bottom
FB11 "L0402" L0402 2613.12,2213.49 r90 bottom
FB12 "L0402" L0402 1599.21,1884.65 r180 top
FB13 "L0402" L0402 1058.36,1911.31 r90 bottom
FPC1 "FPC_26PIN" FPC_26PIN 2125.98,2165.35 r180 top
J1 "SM_125X4_90" SM_125X4_90 1433.31,2276.58 r180 top
J2 "SM_125X4_90" SM_125X4_90 1577.64,594.32 r0 top
J3 "SM_125X2_180" SM_125X2_180 765.52,1859.22 r90 top
J5 "PJ-265CB" PJ-265CB 846.46,-149.61 r270 top
J6 "CON_5P_1.25" CON_5P_1.25 900.22,2137.8 r0 top
J7 "CON2P254" CON2P254 2493.51,179.06 r90 top
J8 "USB-MINI-B" USB-MINI-B 2028.35,-29.53 r0 top
J9 "PJ-342CB-TOP" PJ-342CB-TOP 1437.01,-129.92 r0 bottom
J13 "FPC-40PIN-0.5MM" FPC-40PIN-0.5MM 2027.56,1315.94 r270 bottom
KEY1 "SW5" SW5 -19.69,1560.63 r0 top
KEY2 "SW5" SW5 -19.69,1146.46 r0 top
KEY3 "SW5" SW5 -19.69,732.28 r0 top
KEY4 "SW5" SW5 -19.69,334.25 r0 top
KEY5 "SW5" SW5 -19.69,1974.8 r0 top
L1 "PL4X4" PL4X4 2846.5,1867.83 r180 bottom
L3 "L0402" L0402 1719.88,152.34 r0 bottom
L5 "PL4X4" PL4X4 516.28,408.23 r180 top
L7 "L0402" L0402 1203.43,1604.39 r180 bottom
L9 "PL4X4" PL4X4 779.93,2151.23 r270 bottom
L10 "PL4X4" PL4X4 1458.29,2151.23 r270 bottom
L11 "PL4X4" PL4X4 1105.5,2151.23 r270 bottom
L12 "PL4X4" PL4X4 1742.26,2151.23 r270 bottom
LED1 "LED-0603" LED-0603 9.89,2196.15 r45 top
LED2 "LED-0603" LED-0603 2384.17,81.69 r180 bottom
LED3 "LED-0603" LED-0603 -33.32,2289.74 r135 top
M1 "MARK" MARK 0,2244.09 r180 bottom
M2 "MARK" MARK 2755.91,-19.69 r180 bottom
M3 "MARK" MARK 2736.22,-27.56 r0 top
M4 "MARK" MARK 354.33,2283.46 r0 top
MIC1 "MIC-2DP" MIC-2DP 255.91,334.65 r270 bottom
Q3 "SOT-23" SOT-23 396.66,106.93 r180 bottom
Q4 "SOT-23" SOT-23 472.11,107.15 r0 top
Q5 "SOT-23" SOT-23 344.84,107.15 r0 top
Q6 "SOT-23" SOT-23 1361.74,701.31 r90 bottom
Q7 "SOT-23" SOT-23 1361.74,565.26 r90 bottom
Q8 "SOT-23" SOT-23 2231.43,423.28 r180 bottom
Q9 "SOT-23" SOT-23 1361.74,435.83 r90 bottom
R1 "R0402" R0402 1297.26,1326.63 r0 bottom
R2 "R0402" R0402 1723.65,1166.29 r0 bottom
R3 "R0402" R0402 1287.93,2134.52 r90 top
R4 "R0402" R0402 1591.16,811.81 r180 bottom
R5 "R0402" R0402 1158.53,545.42 r90 top
R6 "R0402" R0402 2264.08,2175.38 r90 bottom
R7 "R0402" R0402 2301.39,2175.38 r90 bottom
R8 "R0402" R0402 2612.98,2189.29 r90 top
R9 "R0402" R0402 2575.7,2189.29 r90 top
R10 "R0402" R0402 1092.47,715.65 r180 bottom
R11 "R0402" R0402 135.65,-19.81 r270 bottom
R12 "R0402" R0402 1164.85,715.65 r180 bottom
R13 "R0402" R0402 187.16,-19.81 r90 bottom
R14 "R0402" R0402 1577.63,1907.9 r270 bottom
R15 "R0402" R0402 1239,2134.52 r90 top
R24 "R0402" R0402 2155.51,1960.64 r90 top
R28 "R0402" R0402 2037.65,2371.5 r180 bottom
R29 "R0402" R0402 1927.49,488.41 r270 bottom
R30 "R0603" R0603 2436.07,2007.28 r90 bottom
R31 "R0402" R0402 2214.07,2035.64 r270 top
R32 "R0402" R0402 1160.91,1911.31 r270 bottom
R33 "R0402" R0402 1160.91,1835.72 r270 bottom
R34 "R0402" R0402 1198.12,1835.72 r270 bottom
R35 "R0402" R0402 2253.94,2035.64 r270 top
R36 "R0402" R0402 2290.91,2035.64 r270 top
R37 "R0603" R0603 2505.1,2007.28 r90 bottom
R45 "R0402" R0402 2622.64,1730.02 r270 bottom
R46 "R0402" R0402 512.63,1598.93 r180 bottom
R47 "R0402" R0402 512.63,1647.19 r0 bottom
R48 "R0402" R0402 600.05,642.98 r0 bottom
R49 "R0402" R0402 2622.64,1635.47 r270 bottom
R50 "R0402" R0402 2896.43,1567.92 r270 bottom
R51 "R0402" R0402 548.08,1372.08 r180 bottom
R52 "R0402" R0402 2709.83,1635.47 r90 bottom
R53 "R0402" R0402 625.46,732.02 r0 bottom
R54 "R0603" R0603 2785.7,1611.19 r270 bottom
R55 "R0402" R0402 600.05,679.05 r180 bottom
R56 "R0402" R0402 815.02,1120.89 r180 top
R57 "R0402" R0402 815.02,1086.89 r180 top
R58 "R0402" R0402 625.46,766.02 r180 bottom
R59 "R0402" R0402 537.92,627.66 r90 bottom
R60 "R0402" R0402 300.56,571.09 r90 top
R61 "R0402" R0402 176.74,571.09 r270 top
R62 "R0402" R0402 234.65,472.99 r0 top
R63 "R0402" R0402 361.2,1918.83 r270 bottom
R64 "R0402" R0402 312.5,1918.83 r90 bottom
R65 "R0402" R0402 232.48,2086.02 r90 bottom
R66 "R0402" R0402 272.44,1918.83 r90 bottom
R67 "R0402" R0402 232.48,1918.83 r90 bottom
R68 "R0402" R0402 2320.87,1872.05 r180 top
R69 "R0402" R0402 2320.87,1915.35 r180 top
R70 "R0402" R0402 2320.87,1612.2 r180 top
R71 "R0402" R0402 2320.87,1655.32 r180 top
R72 "R0402" R0402 2320.87,1828.74 r180 top
R73 "R0402" R0402 2523,1568.9 r180 bottom
R74 "R0402" R0402 2523,1607.29 r180 bottom
R75 "R0402" R0402 2523,1645.77 r180 bottom
R76 "R0402" R0402 2523,1828.74 r180 bottom
R77 "R0402" R0402 2523,1915.31 r180 bottom
R78 "R0402" R0402 2320.87,1568.9 r180 top
R79 "R0402" R0402 2523,1872.05 r180 bottom
R80 "R0402" R0402 2303.75,1725.13 r270 top
R82 "R0402" R0402 1856.56,863.11 r180 top
R83 "R0402" R0402 1778.14,651.93 r90 top
R84 "R0402" R0402 1711.14,304.02 r0 bottom
R85 "R0402" R0402 1801.01,1329.24 r270 bottom
R86 "R0402" R0402 317.88,70.31 r90 bottom
R87 "R0402" R0402 925.6,329.78 r270 top
R88 "R0402" R0402 886,329.78 r90 top
R89 "R0402" R0402 757.1,329.78 r90 top
R90 "R0402" R0402 446.68,-21.94 r90 bottom
R92 "R0402" R0402 548.08,1409.05 r0 bottom
R93 "R0402" R0402 354.33,-21.94 r270 bottom
R94 "R0402" R0402 795.68,329.78 r90 top
R95 "R0402" R0402 1856.75,1364.96 r180 top
R96 "R0402" R0402 1856.75,1404.33 r180 top
R97 "R0402" R0402 637.07,1372.08 r0 bottom
R98 "R0402" R0402 1204.96,51.37 r90 top
R99 "R0402" R0402 1204.94,127.49 r270 top
R100 "R0402" R0402 1490.97,662.23 r180 bottom
R101 "R0402" R0402 26.93,388.3 r90 bottom
R102 "R0402" R0402 -46.84,388.3 r270 bottom
R103 "R0402" R0402 1342.18,2134.52 r270 top
R104 "R0402" R0402 1856.56,822.62 r180 top
R105 "R0603" R0603 641.15,147.6 r180 top
R106 "R0402" R0402 657.71,2022.33 r180 top
R107 "R0402" R0402 657.71,2060.9 r180 top
R108 "R0402" R0402 556.56,220.56 r0 bottom
R109 "R0402" R0402 546.91,2110.17 r180 bottom
R110 "R0402" R0402 370.72,209.25 r180 top
R111 "R0402" R0402 400.53,-21.94 r270 top
R112 "R0402" R0402 370.72,248.48 r0 top
R113 "R0402" R0402 314.69,-21.94 r270 top
R114 "R0402" R0402 354.33,-21.94 r270 top
R115 "R0402" R0402 637.07,1409.38 r180 bottom
R116 "R0402" R0402 1490.52,744.33 r180 bottom
R117 "R0603" R0603 1080.33,63.03 r90 top
R118 "R0402" R0402 546.91,2148.03 r180 bottom
R121 "R0402" R0402 1577.63,1798.81 r90 bottom
R122 "R0603" R0603 2015.01,207.22 r180 bottom
R123 "R0402" R0402 317.39,472.99 r180 top
R124 "R0402" R0402 317.39,472.99 r0 bottom
R125 "R0402" R0402 120.11,650.26 r180 bottom
R126 "R0402" R0402 44.04,650.26 r180 bottom
R127 "R0402" R0402 102.04,388.3 r270 bottom
R128 "R0402" R0402 1856.56,1109.54 r180 top
R129 "R0603" R0603 2555.4,-53.7 r180 bottom
R130 "R0402" R0402 156.46,472.99 r0 top
R131 "R0402" R0402 1058.47,1762.44 r90 bottom
R132 "R0402" R0402 867.99,2443.42 r180 bottom
R133 "R0402" R0402 781.11,2443.42 r180 bottom
R134 "R0402" R0402 1856.56,1070.04 r180 top
R135 "R0402" R0402 1856.56,1259.92 r180 top
R136 "R0402" R0402 1856.56,1223.2 r180 top
R137 "R0402" R0402 884.99,2300.46 r90 bottom
R138 "R0603" R0603 2555.4,10.22 r180 bottom
R139 "R0402" R0402 823.46,420.89 r0 bottom
R140 "R0402" R0402 823.46,381.58 r180 bottom
R141 "R0402" R0402 1482.96,2435.84 r180 bottom
R142 "R0402" R0402 1499.96,2300.46 r270 bottom
R143 "R0402" R0402 906.6,381.58 r180 bottom
R144 "R0402" R0402 2616.37,2342.58 r0 top
R145 "R0402" R0402 1482.96,2471.5 r0 bottom
R146 "R0603" R0603 1142.69,2054 r0 top
R147 "R0402" R0402 1170.72,2443.42 r180 bottom
R148 "R0402" R0402 1094.69,2443.42 r180 bottom
R149 "R0402" R0402 1817.4,2383.74 r90 bottom
R150 "R0402" R0402 1800.4,2443.42 r0 bottom
R151 "R0402" R0402 2355.64,168.51 r180 bottom
R152 "R0402" R0402 127.37,2161.04 r180 top
R153 "R0402" R0402 127.37,2268.53 r180 top
R154 "R0402" R0402 2355.64,205.81 r180 bottom
R155 "R0402" R0402 2248.22,261.7 r180 bottom
R156 "R0402" R0402 2248.22,301.32 r0 bottom
R157 "R0402" R0402 546.91,2186.53 r0 bottom
R159 "R0402" R0402 2234.23,525.64 r180 bottom
R161 "R0402" R0402 906.6,466.03 r180 bottom
R162 "R0402" R0402 906.6,420.89 r180 bottom
R163 "R0402" R0402 823.46,341.73 r0 bottom
R164 "R0402" R0402 906.6,503.54 r180 bottom
R165 "R0402" R0402 823.46,503.54 r180 bottom
R166 "R0402" R0402 2234.23,566 r0 bottom
R167 "R0402" R0402 140.16,1411.74 r270 top
R168 "R0402" R0402 2355.64,131.53 r180 bottom
R169 "R0402" R0402 317.39,510.89 r180 top
R170 "R0402" R0402 64.97,388.3 r270 bottom
R171 "R0402" R0402 102.9,1411.74 r90 top
R172 "R0402" R0402 102.9,997.57 r90 top
R173 "R0402" R0402 1490.86,706.32 r0 bottom
R174 "R0402" R0402 1240.63,674.46 r0 bottom
R175 "R0402" R0402 1490.97,624.2 r0 bottom
R176 "R0402" R0402 1490.97,543.37 r0 bottom
R177 "R0402" R0402 1490.97,583.57 r0 bottom
R178 "R0402" R0402 1815.77,1166.7 r180 bottom
R179 "R0402" R0402 1817.4,2300.46 r270 bottom
R180 "R0402" R0402 1187.72,2300.46 r270 bottom
R181 "R0402" R0402 317.88,159.89 r90 bottom
R184 "R0402" R0402 1240.63,713.44 r180 bottom
R185 "R0402" R0402 1020.87,1762.44 r90 bottom
R186 "R0402" R0402 1187.72,2383.74 r90 bottom
R187 "R0402" R0402 1499.96,2383.74 r90 bottom
R188 "R0402" R0402 884.99,2383.74 r90 bottom
R189 "R0402" R0402 1237.36,388.85 r0 bottom
R190 "R0402" R0402 1490.42,398.33 r180 bottom
R191 "R0402" R0402 1490.42,473.33 r0 bottom
R192 "R0402" R0402 1856.56,1186.35 r180 top
R193 "R0402" R0402 1856.56,1148.77 r180 top
R194 "R0402" R0402 1938.98,1086.88 r90 bottom
R195 "R0402" R0402 1577.63,1981.72 r270 bottom
R196 "R0402" R0402 1540.87,1798.81 r90 bottom
R198 "R0402" R0402 1711.71,304.02 r180 top
R199 "R0402" R0402 1711.71,382.1 r0 top
R200 "R0402" R0402 1204.79,127.45 r270 bottom
R201 "R0402" R0402 1701.89,-2.69 r270 bottom
R288 "R0402" R0402 485.11,1494.04 r270 bottom
RN4 "0402-8P4R" 0402-8P4R 1961.1,1990.67 r180 top
RN5 "0402-8P4R" 0402-8P4R 2066.6,1990.67 r180 top
RN6 "0402-8P4R" 0402-8P4R 1854.77,1990.67 r180 top
TP1 "TP$2F$D1.0" TP$2F$D1.0 1293.06,2037.62 r0 top
TP2 "TP$2F$D1.0" TP$2F$D1.0 606.42,1954.43 r0 top
TP3 "TP$2F$D1.0" TP$2F$D1.0 1024.27,1946.67 r0 top
TP4 "TP$2F$D1.0" TP$2F$D1.0 645.73,1884.8 r0 top
TP5 "TP$2F$D1.0" TP$2F$D1.0 606.81,1835.59 r0 top
TP6 "TP$2F$D1.0" TP$2F$D1.0 960.54,1654.91 r0 top
TP9 "TP$2F$D1.0" TP$2F$D1.0 1191.88,1573.51 r0 top
TP13 "TP$2F$D1.0" TP$2F$D1.0 1818.96,1070.31 r270 bottom
TP16 "TP$2F$D1.0" TP$2F$D1.0 1873.75,1454.56 r180 top
TP21 "TP$2F$D1.0" TP$2F$D1.0 1619.97,2104.23 r0 top
TP22 "TP$2F$D1.0" TP$2F$D1.0 1773.68,1034.04 r0 bottom
TP23 "TP$2F$D1.0" TP$2F$D1.0 1847.62,1021.19 r0 bottom
TP24 "TP$2F$D1.0" TP$2F$D1.0 1769.76,971.43 r0 bottom
TP25 "TP$2F$D1.0" TP$2F$D1.0 1824.92,970.56 r0 bottom
U1 "FBGA-569-0.65-17X17" FBGA-569-0.65-17X17 1412.43,1135.01 r270 top
U2 "SOT-23" SOT-23 170.52,-23.93 r270 top
U4 "SOT23-5" SOT23-5 2073.8,2291.31 r90 bottom
U6 "SOT23-6" SOT23-6 1984.74,165.88 r90 bottom
U7 "SOT23-5" SOT23-5 1964.89,615.7 r180 bottom
U8 "SOT23-6" SOT23-6 2845.25,1713.02 r270 bottom
U9 "MSOP8" MSOP8 325.51,2086.02 r180 bottom
U10 "MSOP8" MSOP8 2431.8,2250.56 r0 bottom
U11 "LGA12$2F$2X2" LGA12$2F$2X2 2833.13,2223.91 r0 bottom
U12 "WSON-8" WSON-8 1753.14,589.1 r90 bottom
U13 "FBGA-96-0.8" FBGA-96-0.8 614.78,1427.45 r270 top
U14 "SOT23-6" SOT23-6 507.92,257.9 r270 top
U15 "SOT23-5" SOT23-5 1118.28,91.57 r0 top
U16 "SOT-23" SOT-23 2271.55,2289.22 r270 bottom
U17 "SOT23-5" SOT23-5 1158.68,1728.94 r90 bottom
U18 "SOT23-5" SOT23-5 760.7,2341.44 r180 bottom
U19 "SOT23-5" SOT23-5 1381.35,2341.44 r180 bottom
U20 "SOT23-5" SOT23-5 1074.29,2341.44 r180 bottom
U21 "SOT23-5" SOT23-5 1698.09,2341.44 r180 bottom
U22 "SOT23-5" SOT23-5 2255.55,150.28 r180 bottom
U23 "QFN40_PR2000" QFN40_PR2000 1381,1892.37 r270 bottom
U25 "SOT23-5" SOT23-5 949.3,1911.7 r90 bottom
U30 "FBGA-96-0.8" FBGA-96-0.8 614.78,781.78 r270 top
U35 "SOT96-1" SOT96-1 75.21,526.99 r270 bottom
Y1 "CRY3225" CRY3225 1213.18,591.41 r0 top
Y3 "CRY3225" CRY3225 1627.39,1954.03 r270 bottom
Y4 "XTAL$2F$FC135" XTAL$2F$FC135 2405.6,2428.91 r180 bottom

## Footprints (in the part's own frame and the unit in brackets; to place one, negate y for a bottom-side part, rotate by r counter-clockwise, add the part's x,y. Pads: shape width x height; smd on the part's side, far side on the other; paste and mask are expansions set on the pad)
0402-8P4R [mm]
  rect 0.4x0.7 smd: 1(0.8,0.5) 4(-0.8,0.5) 5(-0.8,-0.5) 8(0.8,-0.5)
  rect 0.3x0.7 smd: 2(0.25,0.5) 3(-0.25,0.5) 6(-0.25,-0.5) 7(0.25,-0.5)
  silkscreen extent -1.2,-1 1.2,1
C0402 [mil]
  rect 22x20 smd: 1(-17,0) 2(17,0)
  silkscreen extent -33,-15 33,15
C0603 [mil]
  rect 36x30 smd: 1(-30,0) 2(30,0)
  silkscreen extent -65,-25 65,25
C0805 [mm]
  rect 1.7x1.5 smd: 1(-1.25,0) 2(1.25,0)
  silkscreen extent -2.47,-1 2.47,1
CON2P254 [mm]
  round 2.3 hole 1.5: 1(0,0)
  round 2.2 hole 1.5: 2(0,-10)
  silkscreen extent -0.44,-11.94 0.36,-1.46
CON_5P_1.25 [mm]
  rect 0.6x1.5 smd: 1(2.5,0) 2(1.25,0) 3(0,0) 4(-1.25,0) 5(-2.5,0)
  rect 1.9x2.6 smd: 6(-5,2.65) 7(5,2.65)
  silkscreen extent -5.7,0.5 5.7,5
CRY3225 [mm]
  rect 0.9x0.8 smd: 1(0,-1.6) 2(2.2,-1.6) 3(2.2,0) 4(0,0)
  silkscreen extent -0.93,-2.2 2.85,0.6
FBGA-96-0.8 [mm]
  round 0.47 smd: A1(-3.2,6) A2(-2.4,6) A3(-1.6,6) A7(1.6,6) A8(2.4,6) A9(3.2,6) B1(-3.2,5.2) B2(-2.4,5.2) B3(-1.6,5.2) B7(1.6,5.2) B8(2.4,5.2) B9(3.2,5.2) C1(-3.2,4.4) C2(-2.4,4.4) C3(-1.6,4.4) C7(1.6,4.4) C8(2.4,4.4) C9(3.2,4.4) D1(-3.2,3.6) D2(-2.4,3.6) D3(-1.6,3.6) D7(1.6,3.6) D8(2.4,3.6) D9(3.2,3.6) E1(-3.2,2.8) E2(-2.4,2.8) E3(-1.6,2.8) E7(1.6,2.8) E8(2.4,2.8) E9(3.2,2.8) F1(-3.2,2) F2(-2.4,2) F3(-1.6,2) F7(1.6,2) F8(2.4,2) F9(3.2,2) G1(-3.2,1.2) G2(-2.4,1.2) G3(-1.6,1.2) G7(1.6,1.2) G8(2.4,1.2) G9(3.2,1.2) H1(-3.2,0.4) H2(-2.4,0.4) H3(-1.6,0.4) H7(1.6,0.4) H8(2.4,0.4) H9(3.2,0.4) J1(-3.2,-0.4) J2(-2.4,-0.4) J3(-1.6,-0.4) J7(1.6,-0.4) J8(2.4,-0.4) J9(3.2,-0.4) K1(-3.2,-1.2) K2(-2.4,-1.2) K3(-1.6,-1.2) K7(1.6,-1.2) K8(2.4,-1.2) K9(3.2,-1.2) L1(-3.2,-2) L2(-2.4,-2) L3(-1.6,-2) L7(1.6,-2) L8(2.4,-2) L9(3.2,-2) M1(-3.2,-2.8) M2(-2.4,-2.8) M3(-1.6,-2.8) M7(1.6,-2.8) M8(2.4,-2.8) M9(3.2,-2.8) N1(-3.2,-3.6) N2(-2.4,-3.6) N3(-1.6,-3.6) N7(1.6,-3.6) N8(2.4,-3.6) N9(3.2,-3.6) P1(-3.2,-4.4) P2(-2.4,-4.4) P3(-1.6,-4.4) P7(1.6,-4.4) P8(2.4,-4.4) P9(3.2,-4.4) R1(-3.2,-5.2) R2(-2.4,-5.2) R3(-1.6,-5.2) R7(1.6,-5.2) R8(2.4,-5.2) R9(3.2,-5.2) T1(-3.2,-6) T2(-2.4,-6) T3(-1.6,-6) T7(1.6,-6) T8(2.4,-6) T9(3.2,-6)
  silkscreen extent -4.95,-7 4.75,7.21
FBGA-569-0.65-17X17 [mm]
  round 0.3 smd: A1(-7.8,7.8) A2(-7.15,7.8) A3(-6.5,7.8) A4(-5.85,7.8) A5(-5.2,7.8) A6(-4.55,7.8) A7(-3.9,7.8) A8(-3.25,7.8) A9(-2.6,7.8) A10(-1.95,7.8) A11(-1.3,7.8) A12(-0.65,7.8) A13(0,7.8) A14(0.65,7.8) A15(1.3,7.8) A16(1.95,7.8) A17(2.6,7.8) A18(3.25,7.8) A19(3.9,7.8) A20(4.55,7.8) A21(5.2,7.8) A22(5.85,7.8) A23(6.5,7.8) A24(7.15,7.8) A25(7.8,7.8) AA1(-7.8,-5.2) AA2(-7.15,-5.2) AA3(-6.5,-5.2) AA4(-5.85,-5.2) AA5(-5.2,-5.2) AA6(-4.55,-5.2) AA7(-3.9,-5.2) AA8(-3.25,-5.2) AA9(-2.6,-5.2) AA10(-1.95,-5.2) AA11(-1.3,-5.2) AA12(-0.65,-5.2) AA13(0,-5.2) AA14(0.65,-5.2) AA15(1.3,-5.2) AA16(1.95,-5.2) AA17(2.6,-5.2) AA18(3.25,-5.2) AA19(3.9,-5.2) AA20(4.55,-5.2) AA21(5.2,-5.2) AA22(5.85,-5.2) AA23(6.5,-5.2) AA24(7.15,-5.2) AA25(7.8,-5.2) AB1(-7.8,-5.85) AB2(-7.15,-5.85) AB3(-6.5,-5.85) AB4(-5.85,-5.85) AB5(-5.2,-5.85) AB6(-4.55,-5.85) AB7(-3.9,-5.85) AB8(-3.25,-5.85) AB9(-2.6,-5.85) AB10(-1.95,-5.85) AB11(-1.3,-5.85) AB12(-0.65,-5.85) AB13(0,-5.85) AB14(0.65,-5.85) AB15(1.3,-5.85) AB16(1.95,-5.85) AB17(2.6,-5.85) AB18(3.25,-5.85) AB19(3.9,-5.85) AB20(4.55,-5.85) AB21(5.2,-5.85) AB22(5.85,-5.85) AB23(6.5,-5.85) AB24(7.15,-5.85) AB25(7.8,-5.85) AC1(-7.8,-6.5) AC2(-7.15,-6.5) AC3(-6.5,-6.5) AC4(-5.85,-6.5) AC5(-5.2,-6.5) AC6(-4.55,-6.5) AC7(-3.9,-6.5) AC8(-3.25,-6.5) AC9(-2.6,-6.5) AC10(-1.95,-6.5) AC11(-1.3,-6.5) AC12(-0.65,-6.5) AC13(0,-6.5) AC14(0.65,-6.5) AC15(1.3,-6.5) AC16(1.95,-6.5) AC17(2.6,-6.5) AC18(3.25,-6.5) AC19(3.9,-6.5) AC20(4.55,-6.5) AC21(5.2,-6.5) AC22(5.85,-6.5) AC23(6.5,-6.5) AC24(7.15,-6.5) AC25(7.8,-6.5) AD1(-7.8,-7.15) AD2(-7.15,-7.15) AD3(-6.5,-7.15) AD4(-5.85,-7.15) AD5(-5.2,-7.15) AD6(-4.55,-7.15) AD7(-3.9,-7.15) AD8(-3.25,-7.15) AD9(-2.6,-7.15) AD10(-1.95,-7.15) AD11(-1.3,-7.15) AD12(-0.65,-7.15) AD13(0,-7.15) AD14(0.65,-7.15) AD15(1.3,-7.15) AD16(1.95,-7.15) AD17(2.6,-7.15) AD18(3.25,-7.15) AD19(3.9,-7.15) AD20(4.55,-7.15) AD21(5.2,-7.15) AD22(5.85,-7.15) AD23(6.5,-7.15) AD24(7.15,-7.15) AD25(7.8,-7.15) AE1(-7.8,-7.8) AE2(-7.15,-7.8) AE3(-6.5,-7.8) AE4(-5.85,-7.8) AE5(-5.2,-7.8) AE6(-4.55,-7.8) AE7(-3.9,-7.8) AE8(-3.25,-7.8) AE9(-2.6,-7.8) AE10(-1.95,-7.8) AE11(-1.3,-7.8) AE12(-0.65,-7.8) AE13(0,-7.8) AE14(0.65,-7.8) AE15(1.3,-7.8) AE16(1.95,-7.8) AE17(2.6,-7.8) AE18(3.25,-7.8) AE19(3.9,-7.8) AE20(4.55,-7.8) AE21(5.2,-7.8) AE22(5.85,-7.8) AE23(6.5,-7.8) AE24(7.15,-7.8) AE25(7.8,-7.8) B1(-7.8,7.15) B2(-7.15,7.15) B3(-6.5,7.15) B4(-5.85,7.15) B5(-5.2,7.15) B6(-4.55,7.15) B7(-3.9,7.15) B8(-3.25,7.15) B9(-2.6,7.15) B10(-1.95,7.15) B11(-1.3,7.15) B12(-0.65,7.15) B13(0,7.15) B14(0.65,7.15) B15(1.3,7.15) B16(1.95,7.15) B17(2.6,7.15) B18(3.25,7.15) B19(3.9,7.15) B20(4.55,7.15) B21(5.2,7.15) B22(5.85,7.15) B23(6.5,7.15) B24(7.15,7.15) B25(7.8,7.15) C1(-7.8,6.5) C2(-7.15,6.5) C3(-6.5,6.5) C4(-5.85,6.5) C5(-5.2,6.5) C6(-4.55,6.5) C7(-3.9,6.5) C8(-3.25,6.5) C9(-2.6,6.5) C10(-1.95,6.5) C11(-1.3,6.5) C12(-0.65,6.5) C13(0,6.5) C14(0.65,6.5) C15(1.3,6.5) C16(1.95,6.5) C17(2.6,6.5) C18(3.25,6.5) C19(3.9,6.5) C20(4.55,6.5) C21(5.2,6.5) C22(5.85,6.5) C23(6.5,6.5) C24(7.15,6.5) C25(7.8,6.5) D1(-7.8,5.85) D2(-7.15,5.85) D3(-6.5,5.85) D4(-5.85,5.85) D5(-5.2,5.85) D6(-4.55,5.85) D7(-3.9,5.85) D8(-3.25,5.85) D9(-2.6,5.85) D10(-1.95,5.85) D11(-1.3,5.85) D12(-0.65,5.85) D13(0,5.85) D14(0.65,5.85) D15(1.3,5.85) D16(1.95,5.85) D17(2.6,5.85) D18(3.25,5.85) D19(3.9,5.85) D20(4.55,5.85) D21(5.2,5.85) D22(5.85,5.85) D23(6.5,5.85) D24(7.15,5.85) D25(7.8,5.85) E1(-7.8,5.2) E2(-7.15,5.2) E3(-6.5,5.2) E4(-5.85,5.2) E5(-5.2,5.2) E6(-4.55,5.2) E7(-3.9,5.2) E8(-3.25,5.2) E9(-2.6,5.2) E10(-1.95,5.2) E11(-1.3,5.2) E12(-0.65,5.2) E13(0,5.2) E14(0.65,5.2) E15(1.3,5.2) E16(1.95,5.2) E17(2.6,5.2) E18(3.25,5.2) E19(3.9,5.2) E20(4.55,5.2) E21(5.2,5.2) E22(5.85,5.2) E23(6.5,5.2) E24(7.15,5.2) E25(7.8,5.2) F1(-7.8,4.55) F2(-7.15,4.55) F3(-6.5,4.55) F4(-5.85,4.55) F5(-5.2,4.55) F21(5.2,4.55) F22(5.85,4.55) F23(6.5,4.55) F24(7.15,4.55) F25(7.8,4.55) G1(-7.8,3.9) G2(-7.15,3.9) G3(-6.5,3.9) G4(-5.85,3.9) G5(-5.2,3.9) G7(-3.9,3.9) G8(-3.25,3.9) G9(-2.6,3.9) G10(-1.95,3.9) G11(-1.3,3.9) G12(-0.65,3.9) G13(0,3.9) G14(0.65,3.9) G15(1.3,3.9) G16(1.95,3.9) G17(2.6,3.9) G18(3.25,3.9) G19(3.9,3.9) G21(5.2,3.9) G22(5.85,3.9) G23(6.5,3.9) G24(7.15,3.9) G25(7.8,3.9) H1(-7.8,3.25) H2(-7.15,3.25) H3(-6.5,3.25) H4(-5.85,3.25) H5(-5.2,3.25) H7(-3.9,3.25) H8(-3.25,3.25) H9(-2.6,3.25) H10(-1.95,3.25) H11(-1.3,3.25) H12(-0.65,3.25) H13(0,3.25) H14(0.65,3.25) H15(1.3,3.25) H16(1.95,3.25) H17(2.6,3.25) H18(3.25,3.25) H19(3.9,3.25) H21(5.2,3.25) H22(5.85,3.25) H23(6.5,3.25) H24(7.15,3.25) H25(7.8,3.25) J1(-7.8,2.6) J2(-7.15,2.6) J3(-6.5,2.6) J4(-5.85,2.6) J5(-5.2,2.6) J7(-3.9,2.6) J8(-3.25,2.6) J9(-2.6,2.6) J10(-1.95,2.6) J11(-1.3,2.6) J12(-0.65,2.6) J13(0,2.6) J14(0.65,2.6) J15(1.3,2.6) J16(1.95,2.6) J17(2.6,2.6) J18(3.25,2.6) J19(3.9,2.6) J21(5.2,2.6) J22(5.85,2.6) J23(6.5,2.6) J24(7.15,2.6) J25(7.8,2.6) K1(-7.8,1.95) K2(-7.15,1.95) K3(-6.5,1.95) K4(-5.85,1.95) K5(-5.2,1.95) K7(-3.9,1.95) K8(-3.25,1.95) K9(-2.6,1.95) K10(-1.95,1.95) K11(-1.3,1.95) K12(-0.65,1.95) K13(0,1.95) K14(0.65,1.95) K15(1.3,1.95) K16(1.95,1.95) K17(2.6,1.95) K18(3.25,1.95) K19(3.9,1.95) K21(5.2,1.95) K22(5.85,1.95) K23(6.5,1.95) K24(7.15,1.95) K25(7.8,1.95) L1(-7.8,1.3) L2(-7.15,1.3) L3(-6.5,1.3) L4(-5.85,1.3) L5(-5.2,1.3) L7(-3.9,1.3) L8(-3.25,1.3) L9(-2.6,1.3) L10(-1.95,1.3) L11(-1.3,1.3) L12(-0.65,1.3) L13(0,1.3) L14(0.65,1.3) L15(1.3,1.3) L16(1.95,1.3) L17(2.6,1.3) L18(3.25,1.3) L19(3.9,1.3) L21(5.2,1.3) L22(5.85,1.3) L23(6.5,1.3) L24(7.15,1.3) L25(7.8,1.3) M1(-7.8,0.65) M2(-7.15,0.65) M3(-6.5,0.65) M4(-5.85,0.65) M5(-5.2,0.65) M7(-3.9,0.65) M8(-3.25,0.65) M9(-2.6,0.65) M10(-1.95,0.65) M11(-1.3,0.65) M12(-0.65,0.65) M13(0,0.65) M14(0.65,0.65) M15(1.3,0.65) M16(1.95,0.65) M17(2.6,0.65) M18(3.25,0.65) M19(3.9,0.65) M21(5.2,0.65) M22(5.85,0.65) M23(6.5,0.65) M24(7.15,0.65) M25(7.8,0.65) N1(-7.8,0) N2(-7.15,0) N3(-6.5,0) N4(-5.85,0) N5(-5.2,0) N7(-3.9,0) N8(-3.25,0) N9(-2.6,0) N10(-1.95,0) N11(-1.3,0) N12(-0.65,0) N13(0,0) N14(0.65,0) N15(1.3,0) N16(1.95,0) N17(2.6,0) N18(3.25,0) N19(3.9,0) N21(5.2,0) N22(5.85,0) N23(6.5,0) N24(7.15,0) N25(7.8,0) P1(-7.8,-0.65) P2(-7.15,-0.65) P3(-6.5,-0.65) P4(-5.85,-0.65) P5(-5.2,-0.65) P7(-3.9,-0.65) P8(-3.25,-0.65) P9(-2.6,-0.65) P10(-1.95,-0.65) P11(-1.3,-0.65) P12(-0.65,-0.65) P13(0,-0.65) P14(0.65,-0.65) P15(1.3,-0.65) P16(1.95,-0.65) P17(2.6,-0.65) P18(3.25,-0.65) P19(3.9,-0.65) P21(5.2,-0.65) P22(5.85,-0.65) P23(6.5,-0.65) P24(7.15,-0.65) P25(7.8,-0.65) R1(-7.8,-1.3) R2(-7.15,-1.3) R3(-6.5,-1.3) R4(-5.85,-1.3) R5(-5.2,-1.3) R7(-3.9,-1.3) R8(-3.25,-1.3) R9(-2.6,-1.3) R10(-1.95,-1.3) R11(-1.3,-1.3) R12(-0.65,-1.3) R13(0,-1.3) R14(0.65,-1.3) R15(1.3,-1.3) R16(1.95,-1.3) R17(2.6,-1.3) R18(3.25,-1.3) R19(3.9,-1.3) R21(5.2,-1.3) R22(5.85,-1.3) R23(6.5,-1.3) R24(7.15,-1.3) R25(7.8,-1.3) T1(-7.8,-1.95) T2(-7.15,-1.95) T3(-6.5,-1.95) T4(-5.85,-1.95) T5(-5.2,-1.95) T7(-3.9,-1.95) T8(-3.25,-1.95) T9(-2.6,-1.95) T10(-1.95,-1.95) T11(-1.3,-1.95) T12(-0.65,-1.95) T13(0,-1.95) T14(0.65,-1.95) T15(1.3,-1.95) T16(1.95,-1.95) T17(2.6,-1.95) T18(3.25,-1.95) T19(3.9,-1.95) T21(5.2,-1.95) T22(5.85,-1.95) T23(6.5,-1.95) T24(7.15,-1.95) T25(7.8,-1.95) U1(-7.8,-2.6) U2(-7.15,-2.6) U3(-6.5,-2.6) U4(-5.85,-2.6) U5(-5.2,-2.6) U7(-3.9,-2.6) U8(-3.25,-2.6) U9(-2.6,-2.6) U10(-1.95,-2.6) U11(-1.3,-2.6) U12(-0.65,-2.6) U13(0,-2.6) U14(0.65,-2.6) U15(1.3,-2.6) U16(1.95,-2.6) U17(2.6,-2.6) U18(3.25,-2.6) U19(3.9,-2.6) U21(5.2,-2.6) U22(5.85,-2.6) U23(6.5,-2.6) U24(7.15,-2.6) U25(7.8,-2.6) V1(-7.8,-3.25) V2(-7.15,-3.25) V3(-6.5,-3.25) V4(-5.85,-3.25) V5(-5.2,-3.25) V7(-3.9,-3.25) V8(-3.25,-3.25) V9(-2.6,-3.25) V10(-1.95,-3.25) V11(-1.3,-3.25) V12(-0.65,-3.25) V13(0,-3.25) V14(0.65,-3.25) V15(1.3,-3.25) V16(1.95,-3.25) V17(2.6,-3.25) V18(3.25,-3.25) V19(3.9,-3.25) V21(5.2,-3.25) V22(5.85,-3.25) V23(6.5,-3.25) V24(7.15,-3.25) V25(7.8,-3.25) W1(-7.8,-3.9) W2(-7.15,-3.9) W3(-6.5,-3.9) W4(-5.85,-3.9) W5(-5.2,-3.9) W7(-3.9,-3.9) W8(-3.25,-3.9) W9(-2.6,-3.9) W10(-1.95,-3.9) W11(-1.3,-3.9) W12(-0.65,-3.9) W13(0,-3.9) W14(0.65,-3.9) W15(1.3,-3.9) W16(1.95,-3.9) W17(2.6,-3.9) W18(3.25,-3.9) W19(3.9,-3.9) W21(5.2,-3.9) W22(5.85,-3.9) W23(6.5,-3.9) W24(7.15,-3.9) W25(7.8,-3.9) Y1(-7.8,-4.55) Y2(-7.15,-4.55) Y3(-6.5,-4.55) Y4(-5.85,-4.55) Y5(-5.2,-4.55) Y21(5.2,-4.55) Y22(5.85,-4.55) Y23(6.5,-4.55) Y24(7.15,-4.55) Y25(7.8,-4.55)
  silkscreen extent -8.68,-8.5 8.5,8.7
FPC-40PIN-0.5MM [mm]
  rect 0.25x1.15 smd: 1(-9.75,0) 2(-9.25,0) 3(-8.75,0) 4(-8.25,0) 5(-7.75,0) 6(-7.25,0) 7(-6.75,0) 8(-6.25,0) 9(-5.75,0) 10(-5.25,0) 11(-4.75,0) 12(-4.25,0) 13(-3.75,0) 14(-3.25,0) 15(-2.75,0) 16(-2.25,0) 17(-1.75,0) 18(-1.25,0) 19(-0.75,0) 20(-0.25,0) 21(0.25,0) 22(0.75,0) 23(1.25,0) 24(1.75,0) 25(2.25,0) 26(2.75,0) 27(3.25,0) 28(3.75,0) 29(4.25,0) 30(4.75,0) 31(5.25,0) 32(5.75,0) 33(6.25,0) 34(6.75,0) 35(7.25,0) 36(7.75,0) 37(8.25,0) 38(8.75,0) 39(9.25,0) 40(9.75,0)
  rect 2x2.6 smd: 41(-11.95,-2.4) 42(11.95,-2.4)
  silkscreen extent -13.2,-5.8 13.2,1.17
FPC_26PIN [mm]
  rect 0.25x1.5 smd: 1(-6.25,0) 2(-5.75,0) 3(-5.25,0) 4(-4.75,0) 5(-4.25,0) 6(-3.75,0) 7(-3.25,0) 8(-2.75,0) 9(-2.25,0) 10(-1.75,0) 11(-1.25,0) 12(-0.75,0) 13(-0.25,0) 14(0.25,0) 15(0.75,0) 16(1.25,0) 17(1.75,0) 18(2.25,0) 19(2.75,0) 20(3.25,0) 21(3.75,0) 22(4.25,0) 23(4.75,0) 24(5.25,0) 25(5.75,0) 26(6.25,0)
  rect 2x2.6 smd: 27(-8.45,-2.575) 28(8.45,-2.575)
  silkscreen extent -9.7,-5.97 9.7,1.37
L0402 [mil]
  rect 24x20 smd: 1(-20,0) 2(20,0)
  silkscreen extent -39,-20 39,20
L0603 [mil]
  rect 30x30 smd: 1(0,0) 2(60,0)
  silkscreen extent -27,-27 87,28
LED-0603 [mil]
  rect 36x30 smd: 1(-30,0) 2(30,0)
  silkscreen extent -60,-25 60,59
LGA12$2F$2X2 [mm]
  rect 0.35x0.35 smd: 1(-0.75,0.75) 2(-0.75,0.25) 3(-0.75,-0.25) 4(-0.75,-0.75) 5(-0.25,-0.75) 6(0.25,-0.75) 7(0.75,-0.75) 8(0.75,-0.25) 9(0.75,0.25) 10(0.75,0.75) 11(0.25,0.75) 12(-0.25,0.75)
  silkscreen extent -1.75,-1.12 1.12,1.12
MARK [mm]
  round 1 smd: 1(0,0)
  Top keep-out region: 1.5,0 1.386,0.574 1.061,1.061 0.574,1.386 0,1.5 0,1.5 -0.574,1.386 -1.061,1.061 -1.386,0.574 -1.5,0 -1.5,0 -1.386,-0.574 -1.061,-1.061 -0.574,-1.386 0,-1.5 0,-1.5 0.574,-1.386 1.061,-1.061 1.386,-0.574 1.5,0
MIC-2DP [mm]
  rect 1x1 / inner round 1 / far side rect 1x1 hole 0.6: 1(-0.345,0.596)
  round 1 hole 0.6: 2(-0.345,-0.804)
  silkscreen extent -2,-2 2,2
MSOP8 [mm]
  oval 0.38x0.95 smd: 1(-0.975,-2.5) 2(-0.325,-2.5) 3(0.325,-2.5) 4(0.975,-2.5) 5(0.975,2.5) 6(0.325,2.5) 7(-0.325,2.5) 8(-0.975,2.5)
  silkscreen extent -1.5,-1.5 1.5,1.5
PJ-265CB [mm]
  rect 1.3x1.524 smd: 1(-1.85,3.3) 2(-6.9,3.3) 3(-9.9,-3.3) 4(-1.85,-3.3) 5(-9.9,3.3) 6(-4.6,-3.3)
  silkscreen extent -10.6,-3.5 1.5,3.5
PJ-342CB-TOP [mm]
  rect 2.5x1.6 smd: 1(-3.95,-2.63) 2(3.95,-2.8) 3(-3.95,-5.45) 4(-3.95,-10.65) 5(3.95,-9.35) 6(3.95,-11.6)
  silkscreen extent -3.8,-12.1 3.8,2
PL4X4 [mm]
  oval 1.9x3.4 smd: 1(-1.5,0) 2(1.5,0)
  Top region: 1.606,1.195 0.379,1.195 0.379,-1.203 1.606,-1.203 1.606,1.195
  Top region: -0.383,1.221 -1.609,1.221 -1.609,-1.177 -0.383,-1.177 -0.383,1.221
  Top keep-out region: -1.632,2.04 -1.788,2.009 -1.92,1.92 -2.009,1.788 -2.04,1.632 -2.032,1.632 -2.04,-1.632 -2.009,-1.788 -1.92,-1.92 -1.788,-2.009 -1.632,-2.04 -1.632,-2.032 1.632,-2.04 1.788,-2.009 1.92,-1.92 2.009,-1.788 2.04,-1.632 2.032,-1.632 2.04,1.632 2.009,1.788 1.92,1.92 1.788,2.009 1.632,2.04 1.632,2.032 -1.632,2.032
  silkscreen extent -2.03,-2.03 2.03,2.03
QFN40_PR2000 [mm]
  oval 0.9x0.2 smd: 1(-2.5,1.8) 2(-2.5,1.4) 3(-2.5,1) 4(-2.5,0.6) 5(-2.5,0.2) 6(-2.5,-0.2) 7(-2.5,-0.6) 8(-2.5,-1) 9(-2.5,-1.4) 10(-2.5,-1.8) 21(2.5,-1.8) 22(2.5,-1.4) 23(2.5,-1) 24(2.5,-0.6) 25(2.5,-0.2) 26(2.5,0.2) 27(2.5,0.6) 28(2.5,1) 29(2.5,1.4) 30(2.5,1.8)
  oval 0.2x0.8 smd: 11(-1.8,-2.5) 12(-1.4,-2.5) 13(-1,-2.5) 14(-0.6,-2.5) 15(-0.2,-2.5) 16(0.2,-2.5) 17(0.6,-2.5) 18(1,-2.5) 19(1.4,-2.5) 20(1.8,-2.5) 31(1.8,2.5) 32(1.4,2.5) 33(1,2.5) 34(0.6,2.5) 35(0.2,2.5) 36(-0.2,2.5) 37(-0.6,2.5) 38(-1,2.5) 39(-1.4,2.5) 40(-1.8,2.5) 41(0,0)
  Top region: -1.625,-1.625 1.625,-1.625 1.625,1.625 -1.275,1.625 -1.625,1.275 -1.625,-1.625
  silkscreen extent -2.69,-2.5 2.5,2.68
R0402 [mil]
  rect 22x20 smd: 1(-17,0) 2(17,0)
  silkscreen extent -33,-15 33,15
R0603 [mil]
  rect 30x30 smd: 1(0.27,-0.55) 2(60.27,-0.55)
  silkscreen extent -27,-28 87,27
SM_125X2_180 [mil]
  rect 32x63 smd: 1(-23.63,49.21) 2(25.58,49.21)
  rect 78.74x118 smd: 3(-124.02,-64.96) 4(125.98,-64.96)
  silkscreen extent -83,-74 85,14
SM_125X4_90 [mm]
  rect 0.813x1.6 smd: 1(-1.9,1.2) 2(-0.65,1.2) 3(0.65,1.2) 4(1.9,1.2)
  rect 2x2.997 smd: 5(-4.4,-1.65) 6(4.4,-1.65)
  silkscreen extent -3.35,-1.87 3.35,0.33
SOD-123 [mil]
  rect 50x50 smd: 1(0,60) 2(0,-60)
  silkscreen extent -36,-96 36,96
SOT23-5 [mm]
  rect 0.4x0.9 smd: 1(-0.95,-1.35) 2(0,-1.35) 3(0.95,-1.35) 4(0.95,1.35) 5(-0.95,1.35)
  silkscreen extent -1.4,-2.4 1.4,0.8
SOT23-6 [mm]
  rect 0.6x1.2 smd: 1(-0.95,-1.3) 2(0,-1.3) 3(0.95,-1.3) 4(0.95,1.3) 5(0,1.3) 6(-0.95,1.3)
  silkscreen extent -2.26,-2.18 1.49,2.18
SOT96-1 [mm]
  rect 0.6x1.8 smd: 1(-1.905,-3.1)
  oval 0.6x1.8 smd: 2(-0.635,-3.1) 3(0.635,-3.1) 4(1.905,-3.1) 5(1.905,3.1) 6(0.635,3.1) 7(-0.635,3.1) 8(-1.905,3.1)
  silkscreen extent -2.5,-2 2.5,2
SOT-23 [mil]
  rect 36x50 smd: 1(-37.5,-46) 2(37.5,-46) 3(0,41)
  silkscreen extent -55,-50 55,40
SW5 [mm]
  rect 1.6x1.2 smd: 1(1.5,-3.35) 2(1.5,1.15)
  rect 1.8x2 smd: 3(-0.85,-4.45) 4(-0.85,2.15)
  round 0.8 smd: 5(0,0) 6(0,-2.3)
  silkscreen extent -2.1,-3.05 2.28,0.72
TF-CARD [mm]
  rect 0.7x1.8 smd: 1(-0.85,10.5) 2(-1.95,10.5) 3(-3.05,10.5) 4(-4.15,10.5) 5(-5.25,10.5) 6(-6.35,10.5) 7(-7.45,10.5) 8(-8.55,10.5) 9(-9.65,10.5)
  rect 1.6x1.4 smd: 10(-11.25,10) 13(3.8,10)
  rect 1.2x2.2 smd: 11(-10.7,0.4) 12(4.6,0.4)
  round 1 hole 1: 14(0,0) 15(-8,0)
  silkscreen extent -10.4,-7.06 4.3,10.53
TP$2F$D1.0 [mm]
  round 1 smd: 1(0,0)
  silkscreen extent -0.65,-0.65 0.65,0.65
USB-MINI-B [mm]
  rect 0.5x2 smd: 1(-1.617,3.8) 2(-0.817,3.8) 3(-0.017,3.8) 4(0.783,3.8) 5(1.583,3.8)
  rect 1.8x2.5 smd: 6(-4.8,3.8) 7(4.8,3.8)
  rect 1.8x3 smd: 8(4.8,-0.3) 9(-4.8,-0.3)
  silkscreen extent -3.92,-4.75 3.91,2.81
WSON-8 [mm]
  rect 1.8x0.6 smd: 1(-4,1.905) 2(-4,0.635) 3(-4,-0.635) 4(-4,-1.905) 5(4,-1.905) 6(4,-0.635) 7(4,0.635) 8(4,1.905)
  rect 3.4x4.3 smd: 9(0,0)
  silkscreen extent -5.08,-3 5.08,3.6
XTAL$2F$FC135 [mm]
  rect 1.25x1.75 smd: 1(-1.25,0) 2(1.25,0)
  silkscreen extent -0.5,-0.87 0.5,0.87